# Altium PCB PCB1.PcbDoc (part 1 of 7)
Units mm, origin at the board's own origin, x right, y up, seen from the top; angles counter-clockwise.
Board outline 100 x 70 mm, 6 copper layers (Top Layer 1, GND_1, SIG, VCC, GND_2, Bottom Layer 1), stack 0.816 mm thick; 462 components, 328 nets, 2208 pads, 873 vias.
Unrouted connection lines stored in the file: 176.
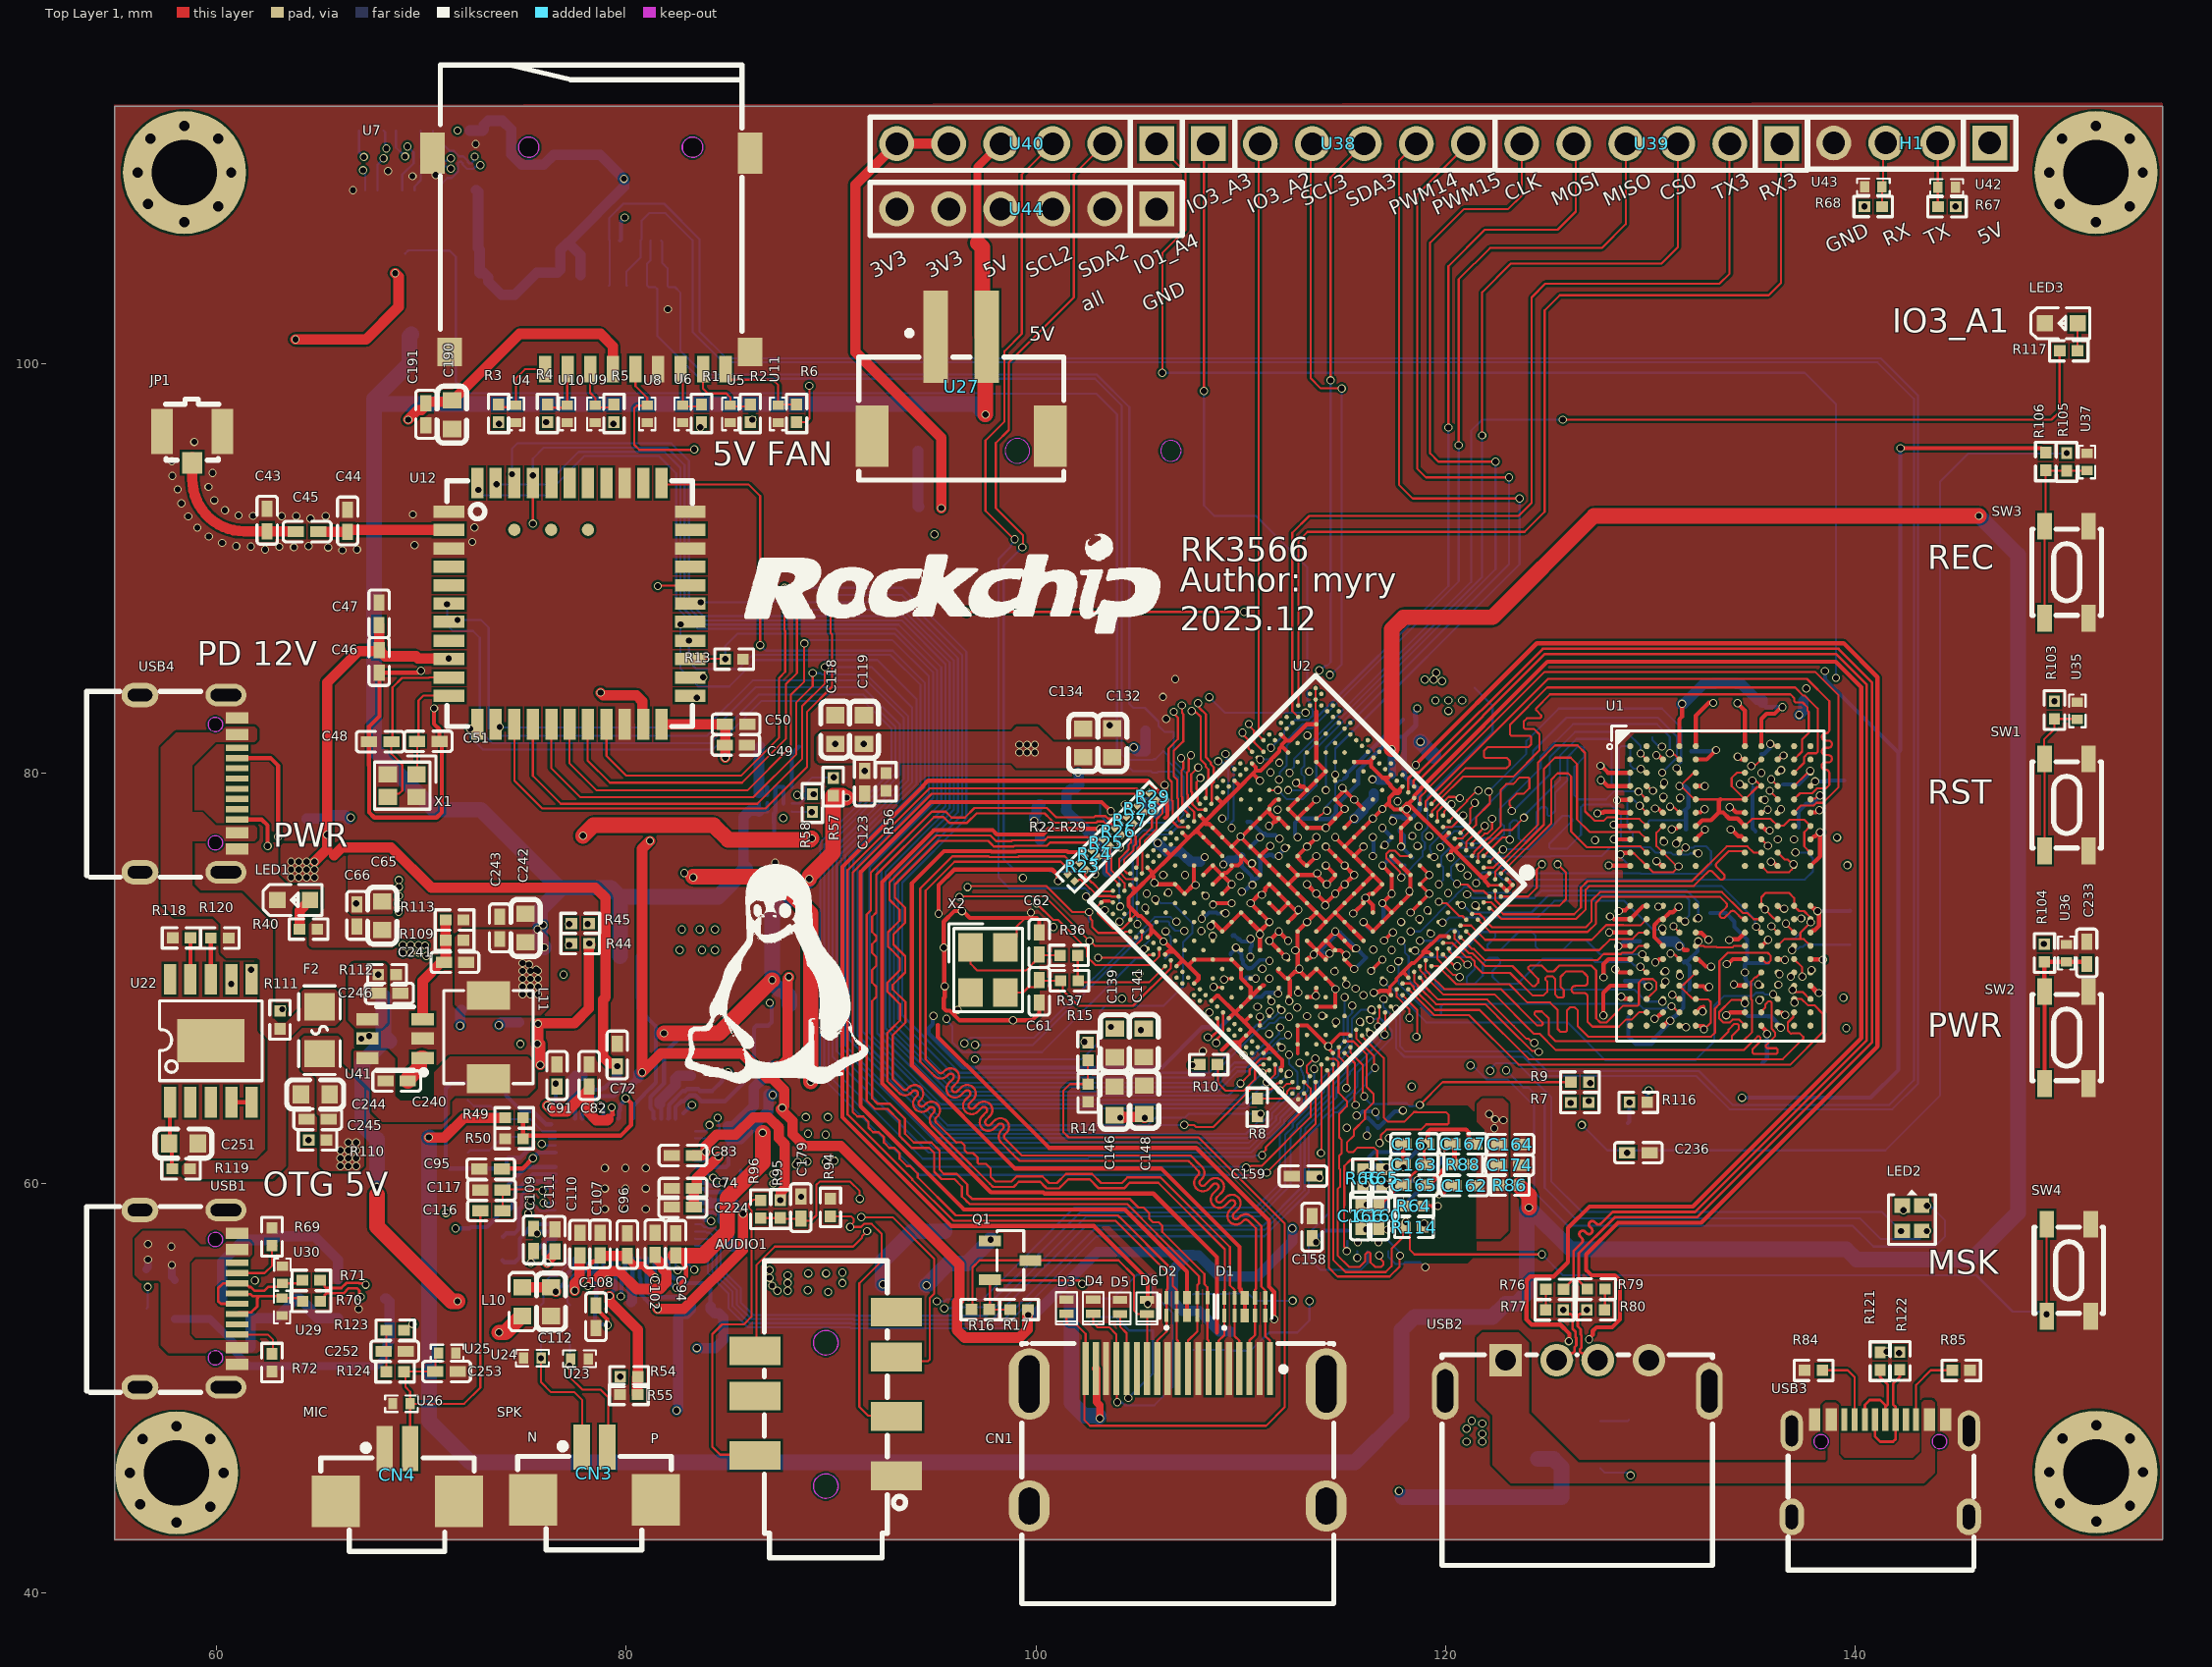
[diagram p0: Top Layer 1 view]
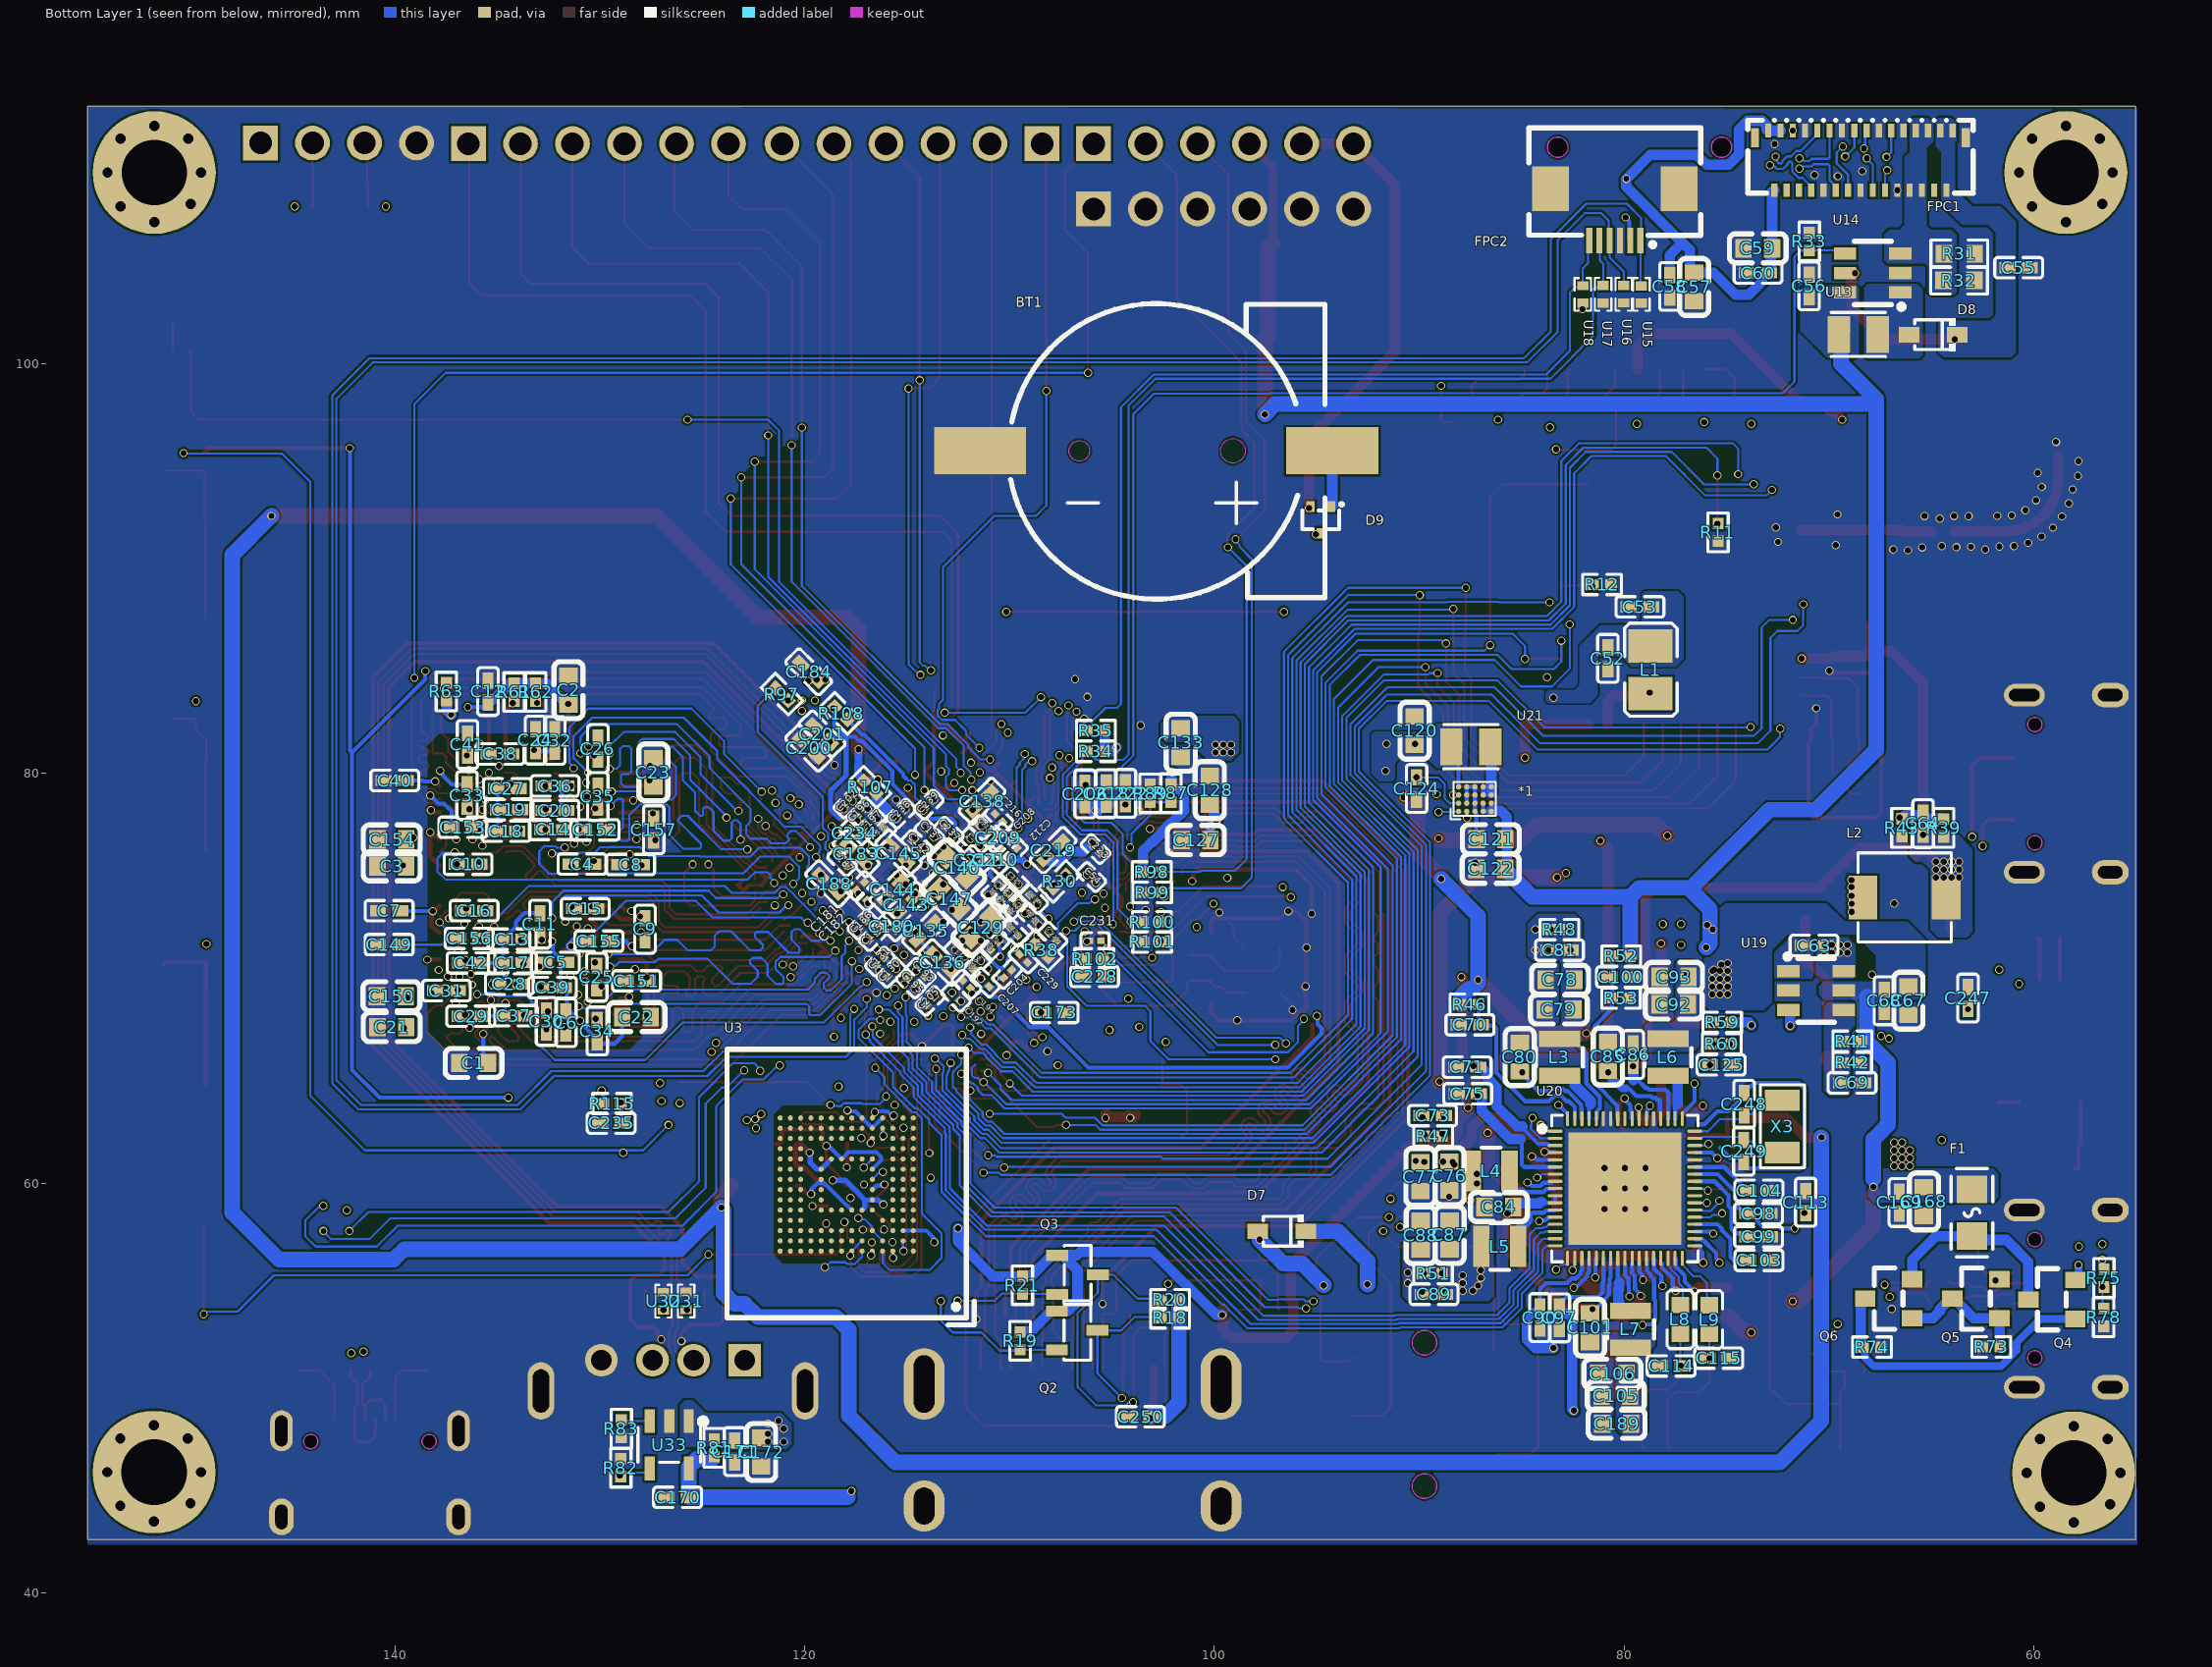
[diagram p1: Bottom Layer 1 view, seen from below]
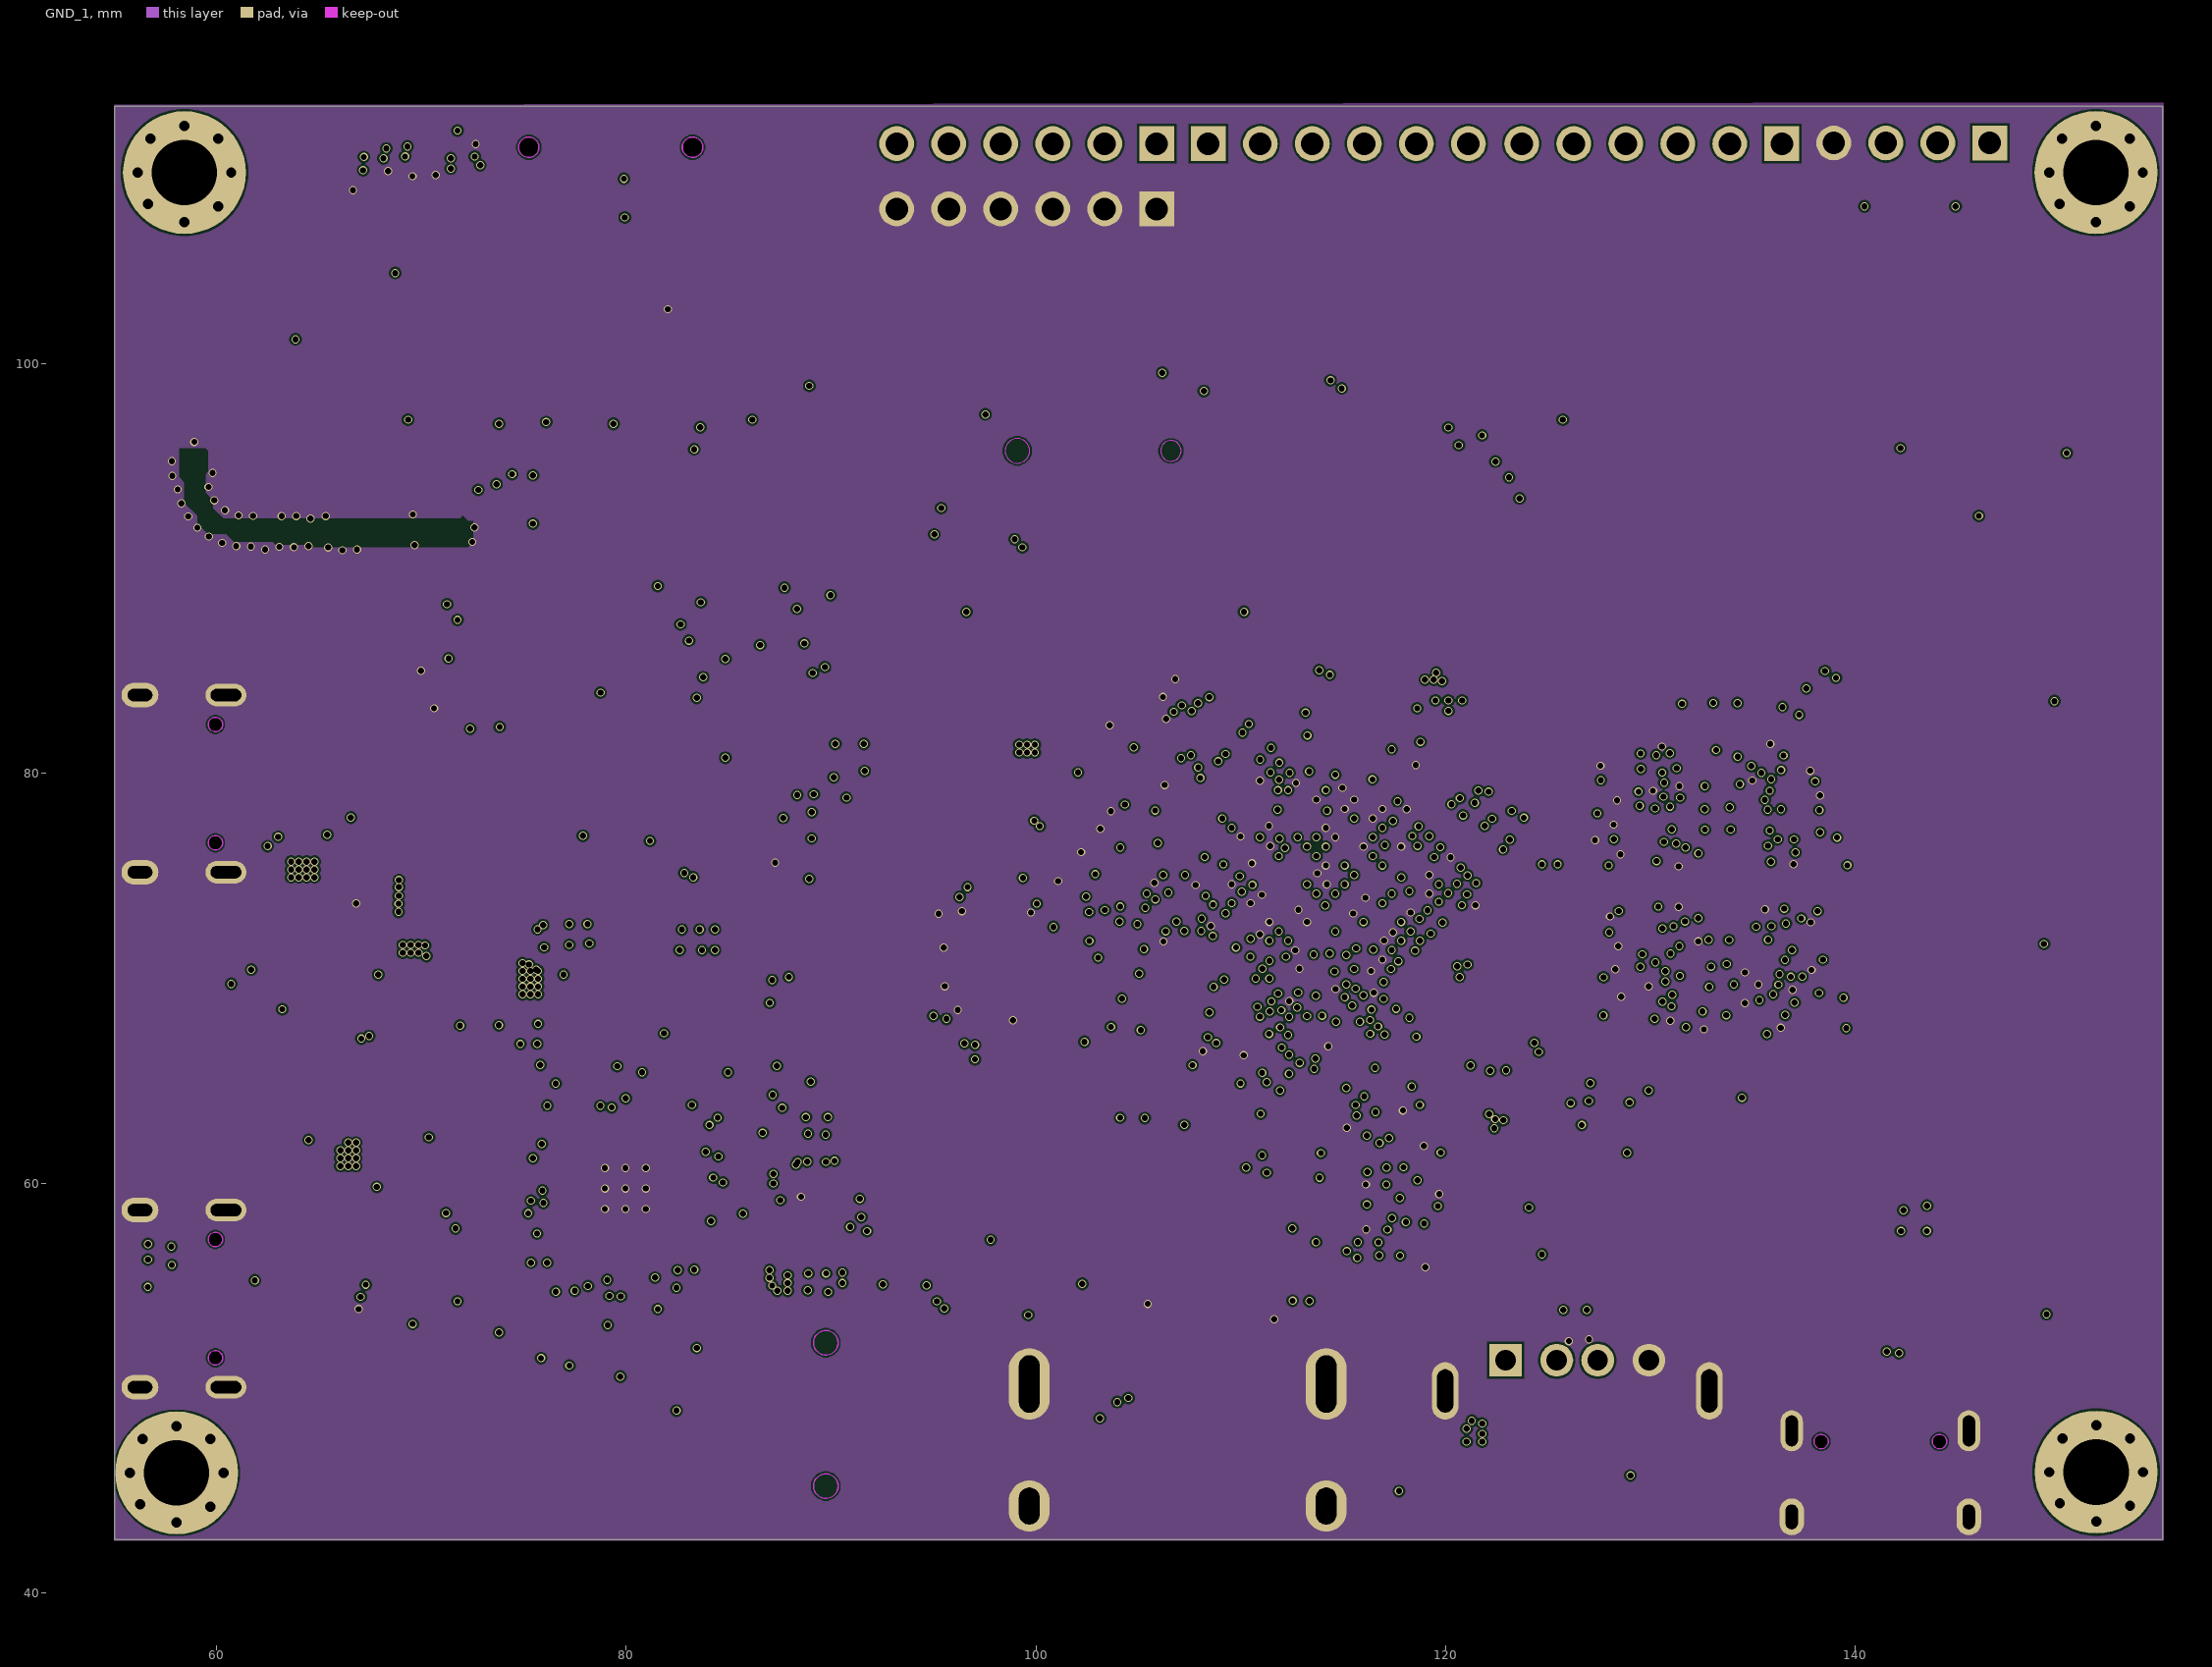
[diagram p2: GND_1]
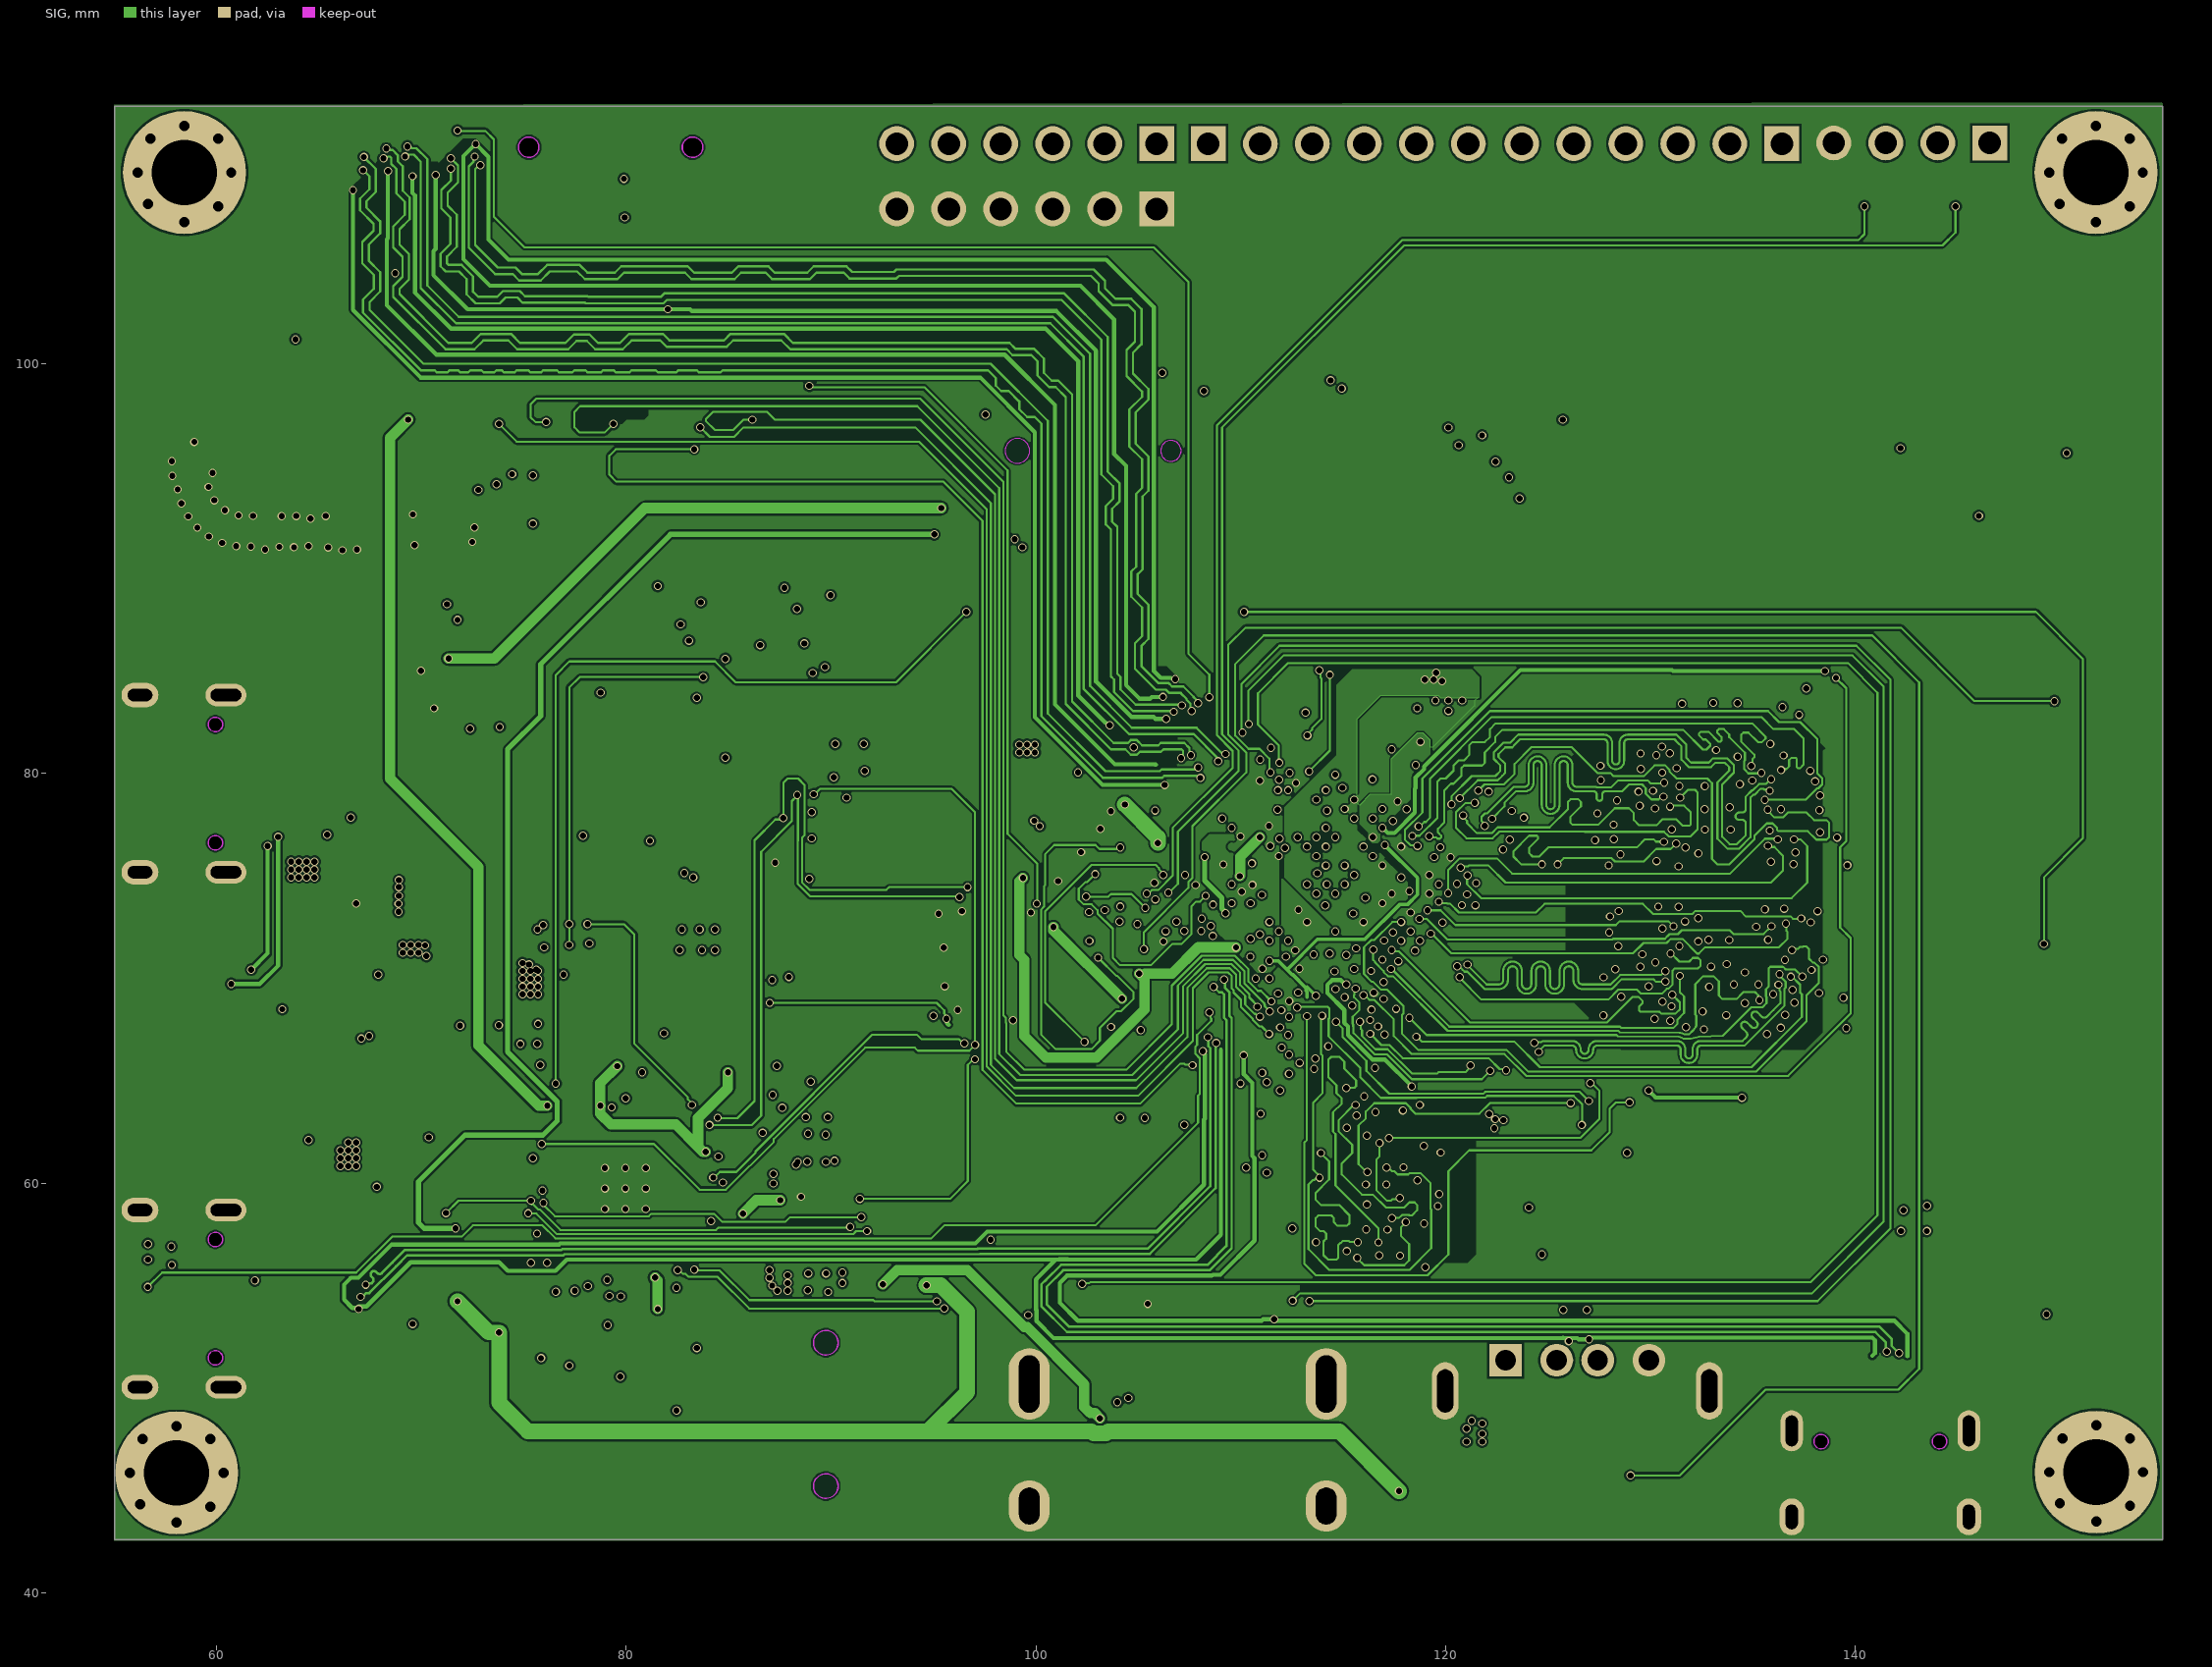
[diagram p3: SIG]
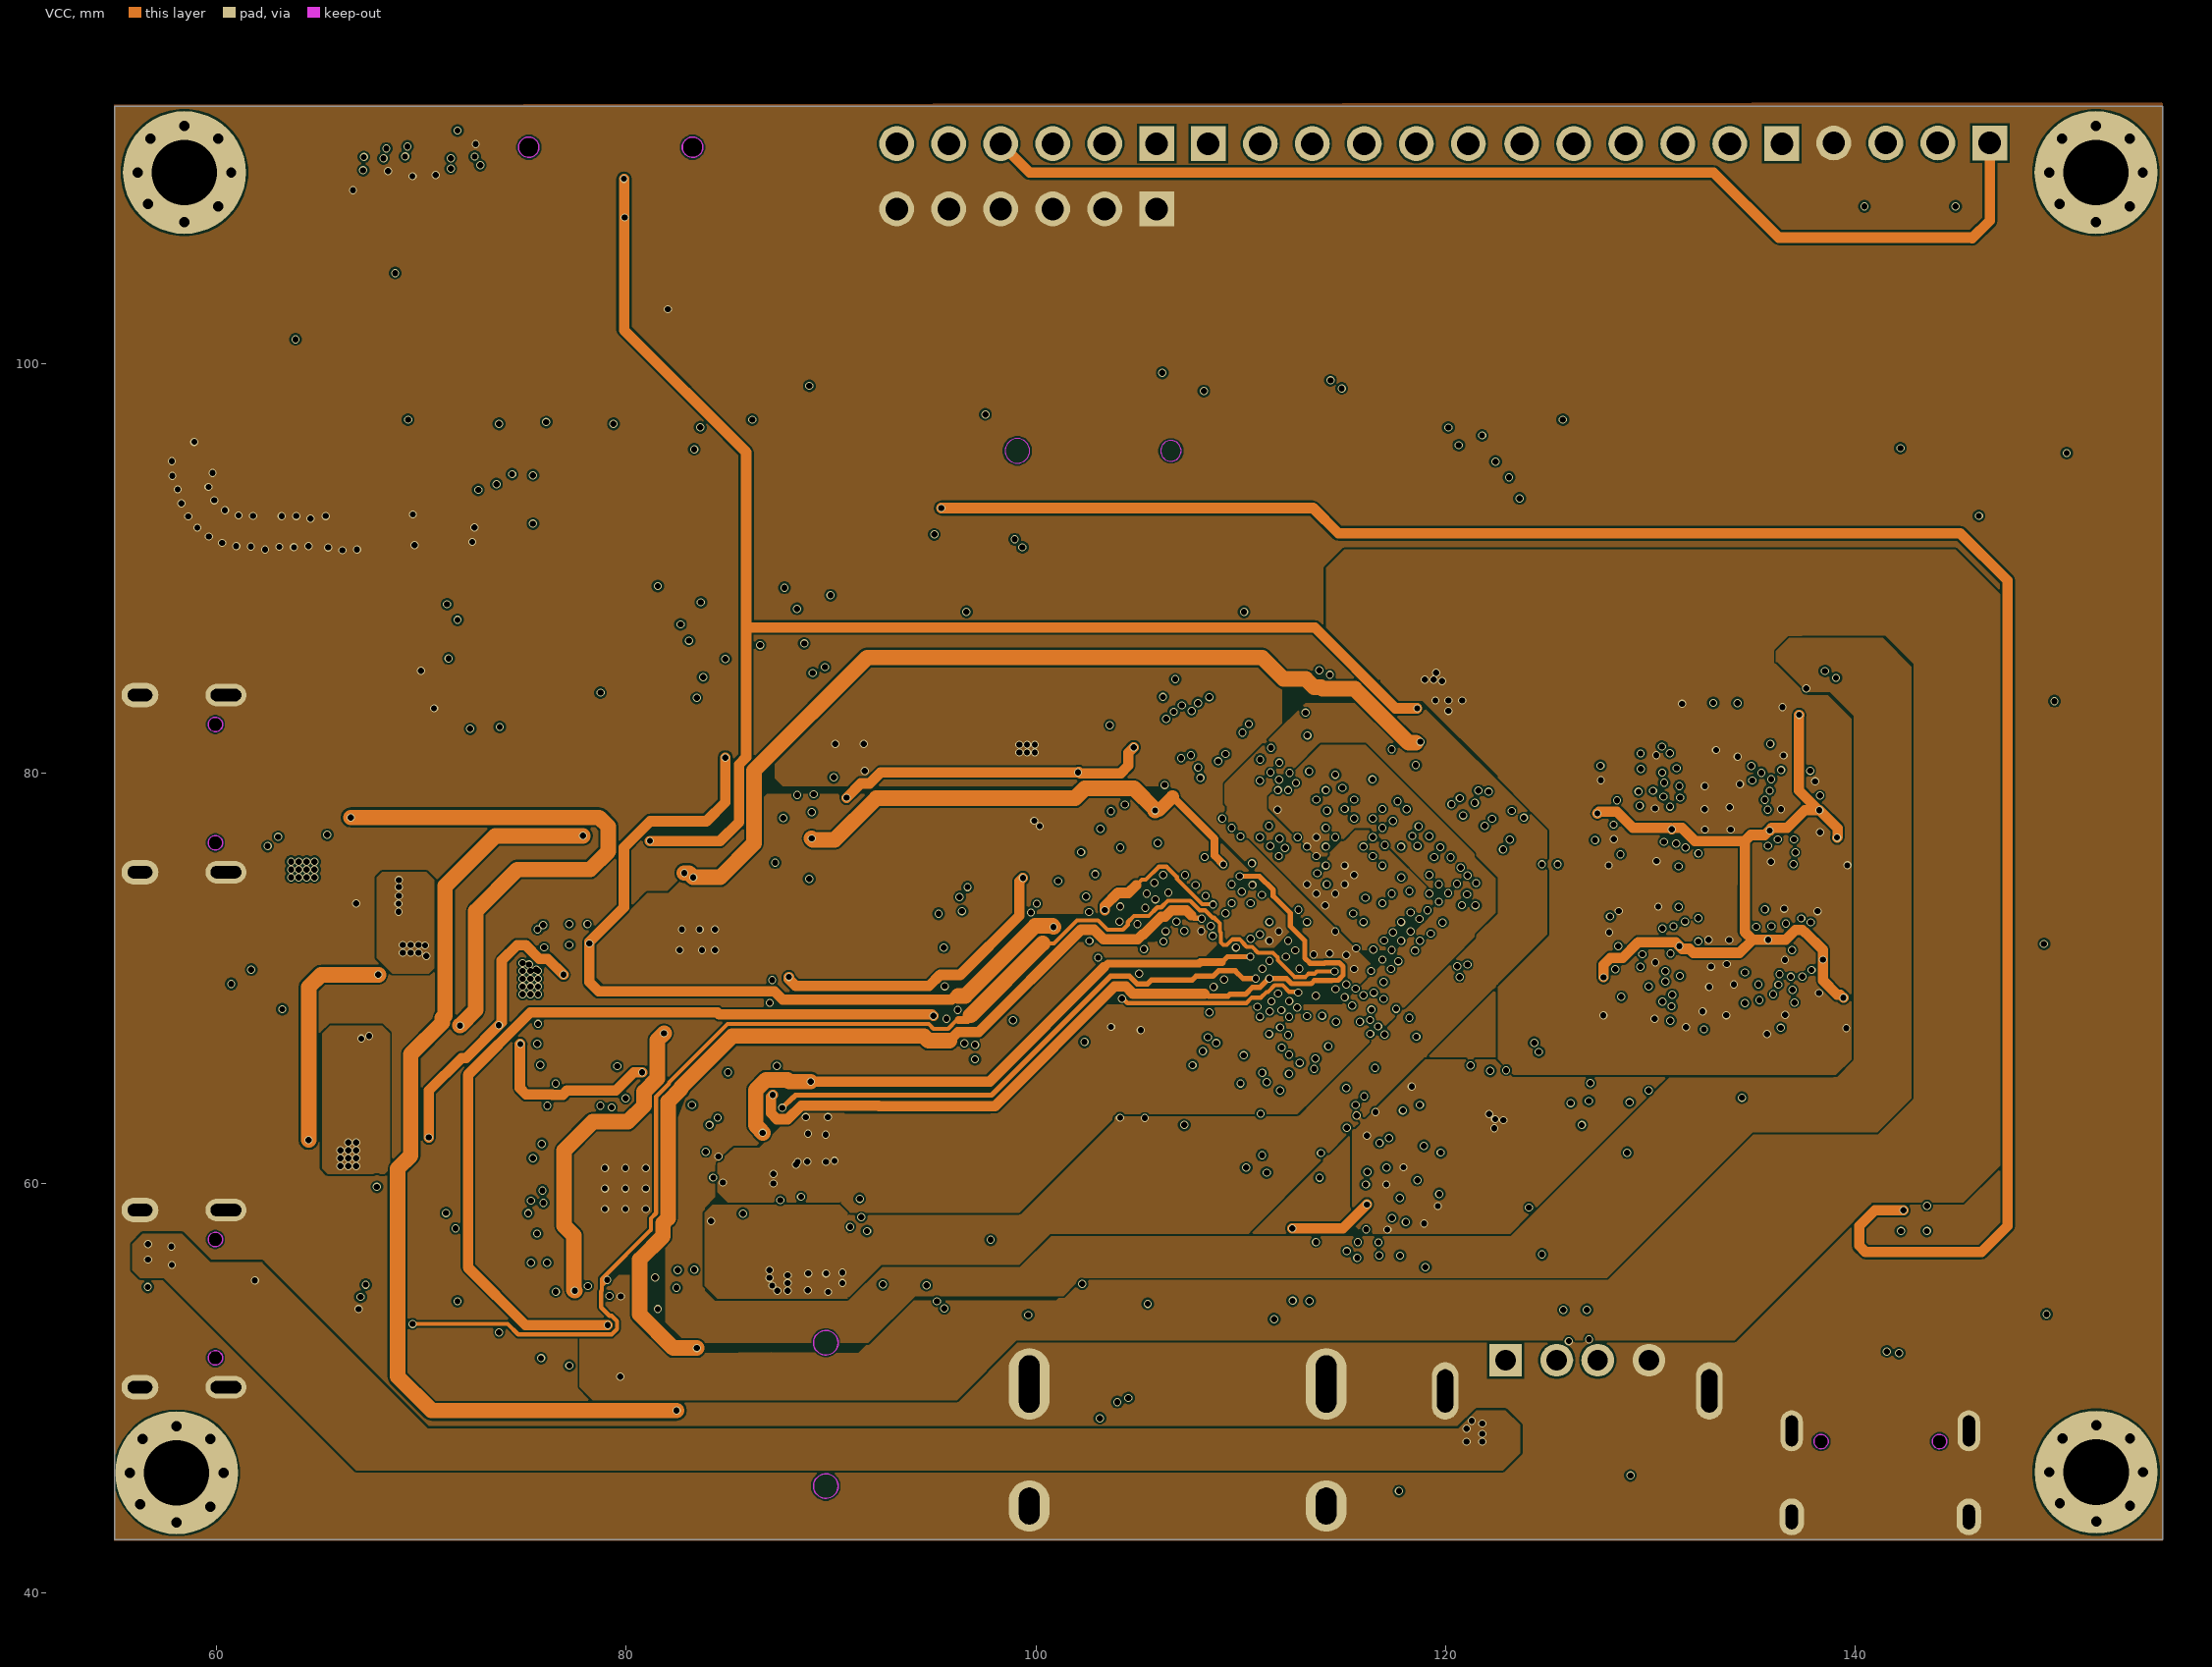
[diagram p4: VCC]
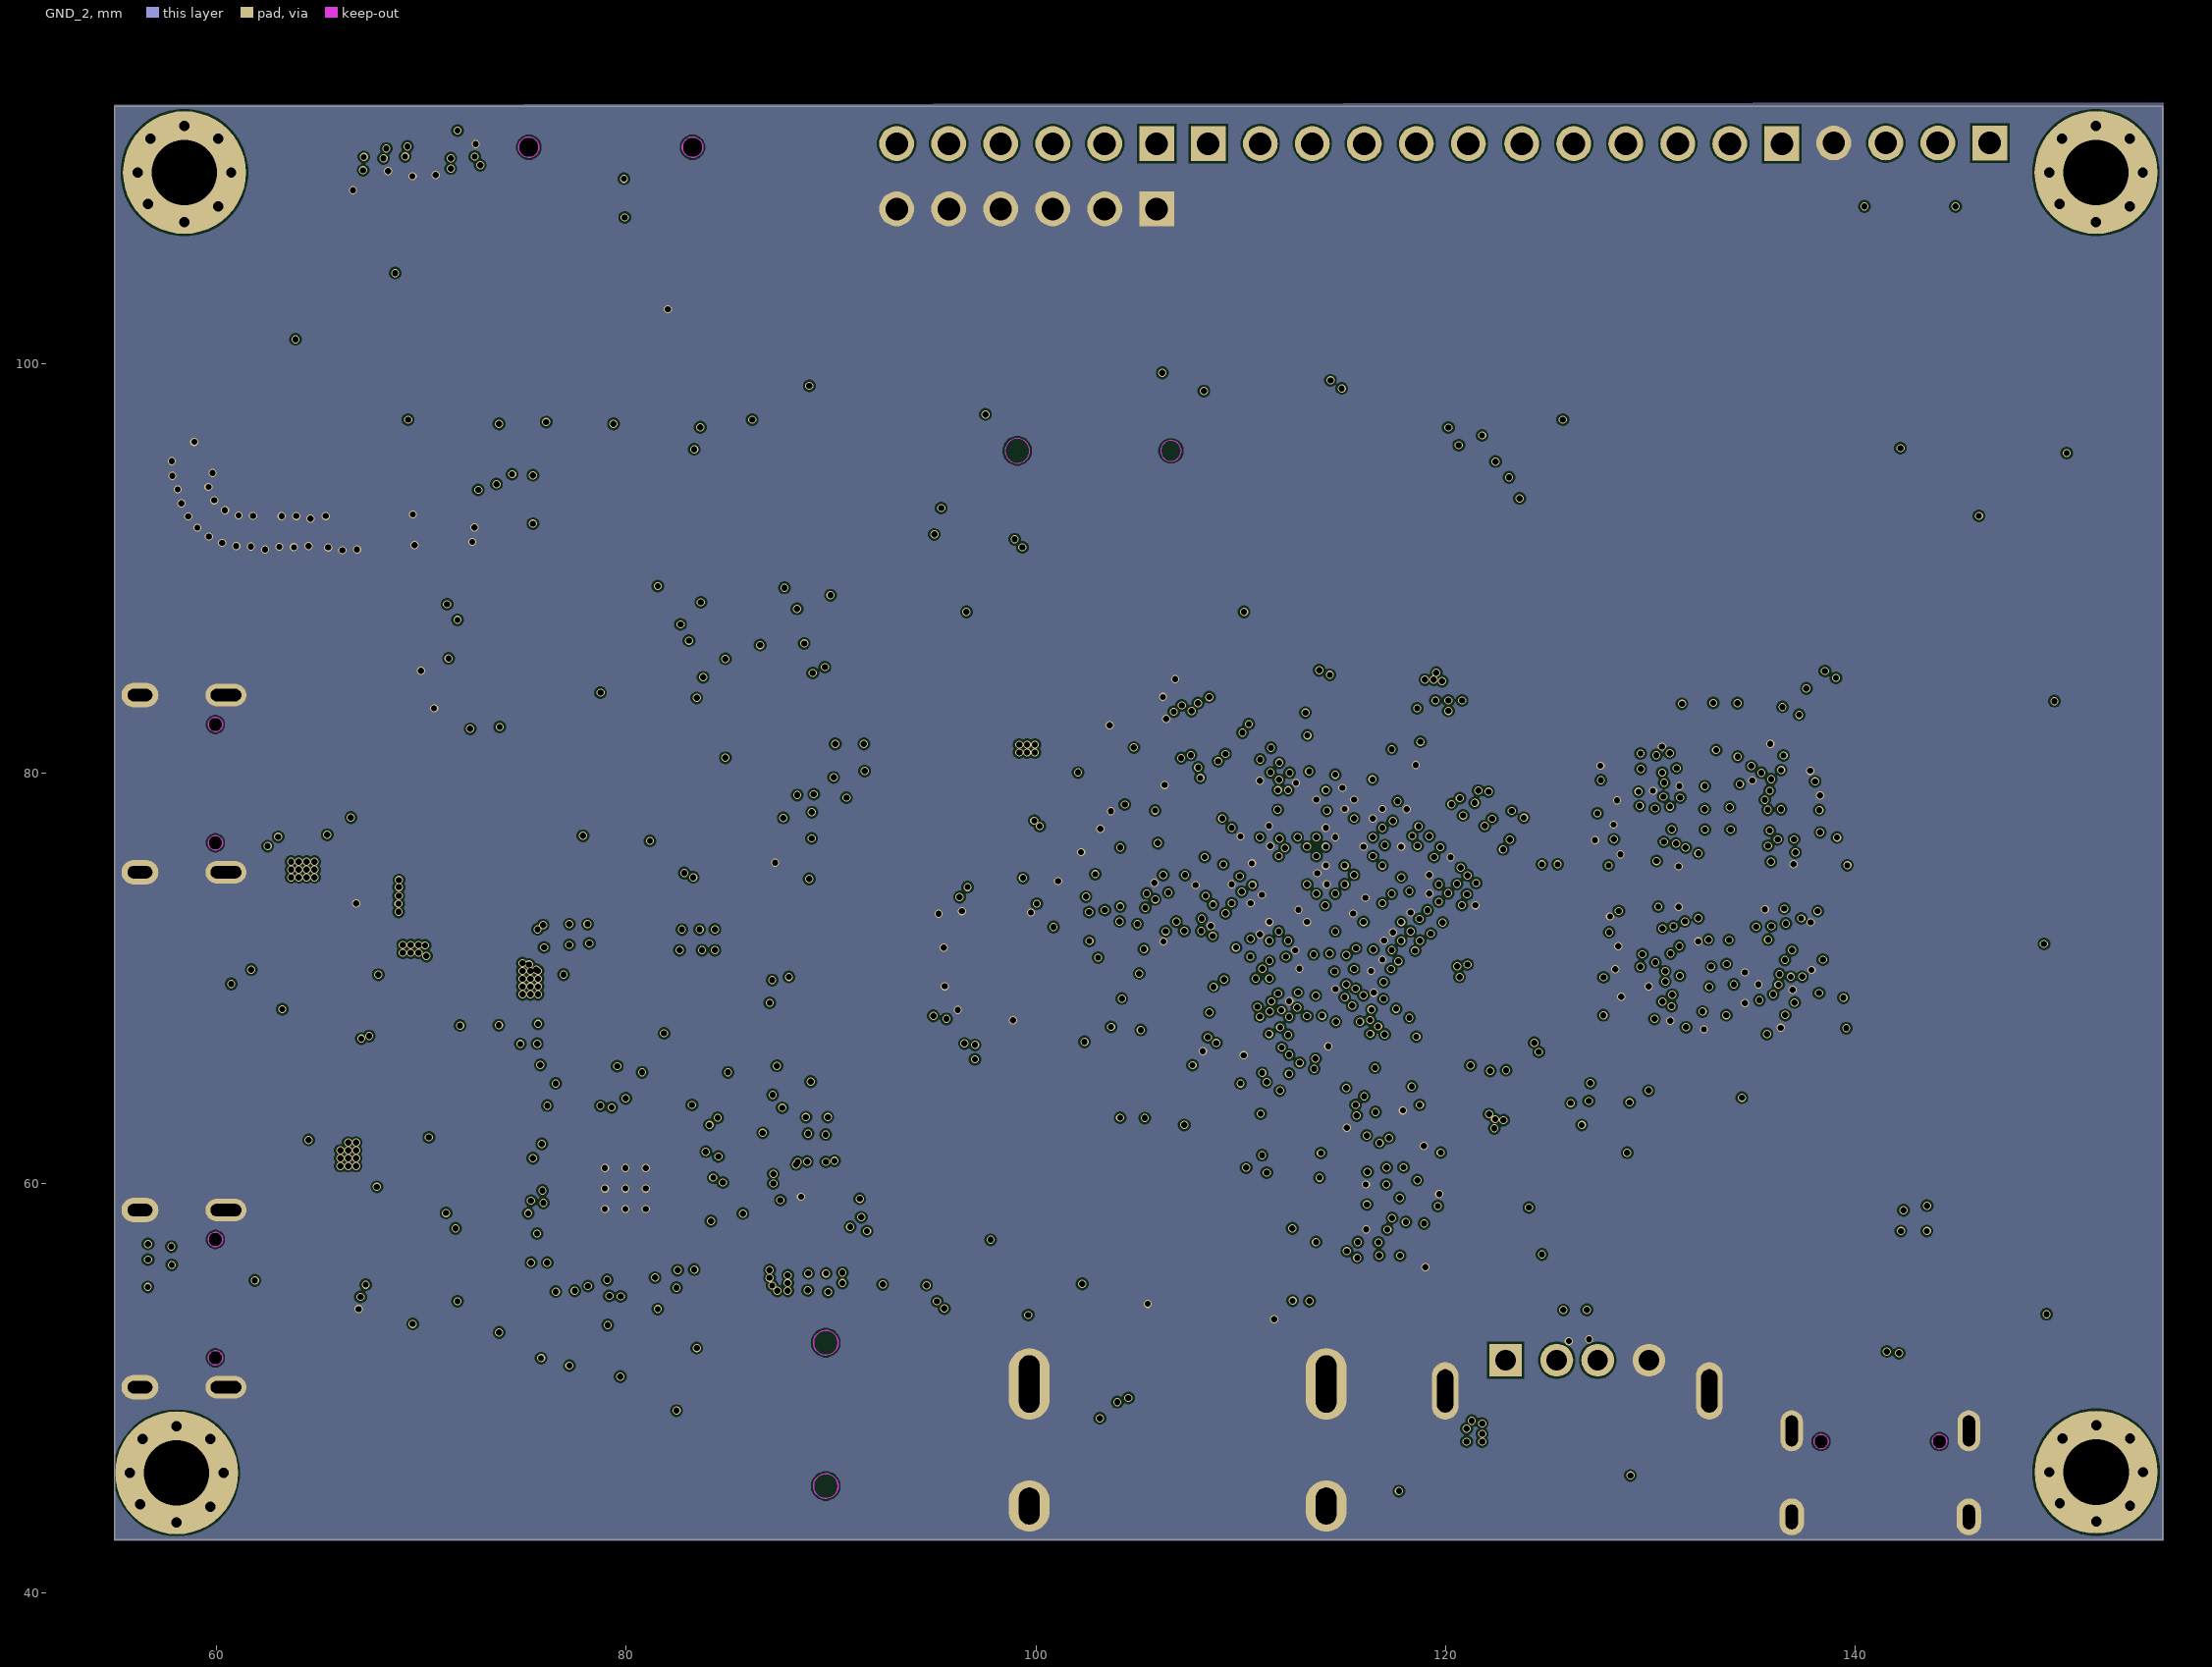
[diagram p5: GND_2]

## Layer stack, top to bottom
Top Solder: solder mask 0.0102, Solder Resist, Dk 3.5
Top Layer 1: signal copper 0.035
Dielectric 2: prepreg 0.0711, PP-006, Dk 4.1
GND_1: signal copper 0.035
Dielectric 4: prepreg 0.0711, PP-006, Dk 4.1
SIG: signal copper 0.0356
Dielectric 1: dielectric 0.32, FR-4, Dk 4.8
VCC: signal copper 0.0356
Dielectric 5: prepreg 0.0711, PP-006, Dk 4.1
GND_2: signal copper 0.035
Dielectric 3: prepreg 0.0711, PP-006, Dk 4.1
Bottom Layer 1: signal copper 0.035
Bottom Solder: solder mask 0.0102, Solder Resist, Dk 3.5

## Board outline
55.012,42.586 55.012,112.586 155.012,112.586 155.012,42.586

## Design rules (kind name [scope] priority, off if disabled: settings)
Clearance [All] p1: gap=0.102 ignorepadtopadclearanceinfootprint=FALSE
DiffPairsRouting 100ohm [InDifferentialPairClass('100ohm')] p1: maxlimit=0.254 minlimit=0.152 mostfreqgap=0.254 toplayer_maxgap=0.152 toplayer_prefgap=0.152 toplayer_minwidth=0.109 toplayer_maxwidth=0.109 toplayer_prefwidth=0.109 midlayer1_mingap=0.254 midlayer1_minwidth=0.381 midlayer1_maxwidth=0.381 midlayer1_prefwidth=0.381 midlayer2_mingap=0.203 midlayer2_maxgap=0.203 midlayer2_prefgap=0.203 midlayer2_minwidth=0.112 midlayer2_maxwidth=0.112 midlayer2_prefwidth=0.112 midlayer3_mingap=0.254 midlayer3_minwidth=0.381 midlayer3_maxwidth=0.381 midlayer3_prefwidth=0.381 midlayer4_mingap=0.254 midlayer4_minwidth=0.381 midlayer4_maxwidth=0.381 midlayer4_prefwidth=0.381 bottomlayer_maxgap=0.152 bottomlayer_prefgap=0.152 bottomlayer_minwidth=0.109 bottomlayer_maxwidth=0.109 bottomlayer_prefwidth=0.109 maxuncoupledlength=12.7
DiffPairsRouting 90ohm [InDifferentialPairClass('90ohm')] p2: maxlimit=0.254 minlimit=0.127 mostfreqgap=0.14 toplayer_maxgap=0.127 toplayer_prefgap=0.127 toplayer_minwidth=0.13 toplayer_maxwidth=0.13 toplayer_prefwidth=0.13 midlayer1_prefgap=0.127 midlayer1_minwidth=0.102 midlayer1_maxwidth=0.102 midlayer1_prefwidth=0.102 midlayer2_mingap=0.14 midlayer2_maxgap=0.14 midlayer2_minwidth=0.119 midlayer2_maxwidth=0.119 midlayer2_prefwidth=0.119 midlayer3_prefgap=0.127 midlayer3_minwidth=0.102 midlayer3_maxwidth=0.102 midlayer3_prefwidth=0.102 midlayer4_prefgap=0.127 midlayer4_minwidth=0.102 midlayer4_maxwidth=0.102 midlayer4_prefwidth=0.102 bottomlayer_prefgap=0.127 bottomlayer_minwidth=0.102 bottomlayer_maxwidth=0.102 bottomlayer_prefwidth=0.102 maxuncoupledlength=12.7
PolygonConnect [All] p1: connectstyle=Direct reliefconductorwidth=0.254 reliefentries=4 polygonreliefangle="90 Angle" airgapwidth=0.254
RoutingVias [All] p1: holewidth=0.152 width=0.254 viastyle="Through Hole" minholewidth=0.152 minwidth=0.254 maxholewidth=0.711 maxwidth=1.27
SolderMaskExpansion [All] p1: expansion=0.102 istentingtop=FALSE
SupplyNets "Schematic Supply Nets_30" [InNet('+12')] p1: voltage=0.000
SupplyNets "Schematic Supply Nets_32" [InNet('VCC12V_DCIN')] p2: voltage=0.000
SupplyNets "Schematic Supply Nets_31" [InNet('VCCIO6')] p3: voltage=0.000
SupplyNets "Schematic Supply Nets_29" [InNet('VCCIO_ACODEC')] p4: voltage=0.000
SupplyNets "Schematic Supply Nets_28" [InNet('VCCIO_SD')] p5: voltage=0.000
SupplyNets "Schematic Supply Nets_27" [InNet('VCCA1V8_IMAGE')] p6: voltage=0.000
SupplyNets "Schematic Supply Nets_26" [InNet('VDDA0V9_PMU')] p7: voltage=0.000
SupplyNets "Schematic Supply Nets_25" [InNet('VCCA_1V8')] p8: voltage=0.000
SupplyNets "Schematic Supply Nets_24" [InNet('VDD_NPU')] p9: voltage=0.000
SupplyNets "Schematic Supply Nets_23" [InNet('GND')] p10: voltage=0.000
SupplyNets "Schematic Supply Nets_22" [InNet('VCC5V0_USB_OTG')] p11: voltage=0.000
SupplyNets "Schematic Supply Nets_21" [InNet('VCC5V_HDMI_TX')] p12: voltage=0.000
SupplyNets "Schematic Supply Nets_20" [InNet('VCC5V0_USB_HOST')] p13: voltage=0.000
SupplyNets "Schematic Supply Nets_19" [InNet('VCCIO_FLASH')] p14: voltage=0.000
SupplyNets "Schematic Supply Nets_18" [InNet('VCCA1V8_PMU')] p15: voltage=0.000
SupplyNets "Schematic Supply Nets_9" [InNet('VCC1V8_DDR')] p16: voltage=0.000
SupplyNets "Schematic Supply Nets_17" [InNet('VCC3V3_SD')] p17: voltage=0.000
SupplyNets "Schematic Supply Nets_16" [InNet('VDDA_0V9')] p18: voltage=0.000
SupplyNets "Schematic Supply Nets_15" [InNet('VCCIO_WL')] p19: voltage=0.000
SupplyNets "Schematic Supply Nets_14" [InNet('VCC_DDR')] p20: voltage=0.000
SupplyNets "Schematic Supply Nets_13" [InNet('VDD_LOGIC')] p21: voltage=0.000
SupplyNets "Schematic Supply Nets_12" [InNet('VDD_CPU')] p22: voltage=0.000
SupplyNets "Schematic Supply Nets_10" [InNet('VDD_GPU')] p23: voltage=0.000
SupplyNets "Schematic Supply Nets_8" [InNet('VCC_1V8')] p24: voltage=0.000
SupplyNets "Schematic Supply Nets_7" [InNet('VDDA0V9_IMAGE')] p25: voltage=0.000
SupplyNets "Schematic Supply Nets_6" [InNet('VCC3V3_SYS')] p26: voltage=0.000
SupplyNets "Schematic Supply Nets_5" [InNet('VCC3V3_PMU')] p27: voltage=0.000
SupplyNets "Schematic Supply Nets_4" [InNet('MIPI_DSI_VCC_LED+')] p28: voltage=0.000
SupplyNets "Schematic Supply Nets_3" [InNet('MIPI_DSI_VCC_LED-')] p29: voltage=0.000
SupplyNets "Schematic Supply Nets_2" [InNet('VCC5V0_SYS')] p30: voltage=0.000
SupplyNets "Schematic Supply Nets_1" [InNet('VCC_3V3')] p31: voltage=0.000
Width LPDDR4A0-5A [InNetClass('LPDDR4_A0-5A')] p1: maxlimit=0.102 minlimit=0.102 preferedwidth=0.102
Width DDR [InNetClass('LPDDR4_1A')] p2: maxlimit=0.102 minlimit=0.102 preferedwidth=0.102
Width [All] p3: maxlimit=1.016 minlimit=0.076 preferedwidth=0.102
29 further rules are at their usual default settings.

## Classes and differential pairs
differential pair class 100ohm: HDMI_TX0 HDMI_TX1 HDMI_TX2 HDMI_TXC MIPI_DSI_0 MIPI_DSI_1 MIPI_DSI_2 MIPI_DSI_3 MIPI_DSI_CLK
differential pair class 90ohm: USB_H1 USB_H2 USB_HOST1 USB_HOST2 USB_OTG0 USB_OTG_D
net class VCCA: VCCA1V8_IMAGE VCCA1V8_PMU VCCA_1V8
net class VDDA: VDDA0V9_IMAGE VDDA0V9_PMU VDDA_0V9
net class VCC: VCC3V3_PMU VCC3V3_SD VCC_1V8 VCC_3V3
net class VCCIO: VCCIO6 VCCIO_ACODEC VCCIO_FLASH VCCIO_SD VCCIO_WL
net class PWR_DDR: VCC1V8_DDR VCC_DDR
net class PWR_SoC: VCC_DDR VDD_CPU VDD_GPU VDD_LOGIC VDD_NPU
net class PWR: +12 VCC3V3_SYS VCC5V0_SYS VCC12V_DCIN
net class PMIC: PMIC_INT_L PMIC_SLEEP_H
net class I2C0: I2C0_SCL_PMIC I2C0_SDA_PMIC
net class I2S1_PMIC: I2S1_LRCK_TX_M0_PMIC I2S1_MCLK_M0_PMIC I2S1_SCLK_TX_M0_PMIC I2S1_SDI0_M0/PDM I2S1_SDO0_MO_PMIC PDM_CLK0_M0_PMIC
net class MIPI_Touch: I2C1_SCL_TP I2C1_SDA_TP MIPI_DSI_0_N MIPI_DSI_0_P MIPI_DSI_1_N MIPI_DSI_1_P MIPI_DSI_2_N MIPI_DSI_2_P MIPI_DSI_3_N MIPI_DSI_3_P MIPI_DSI_CLK_N MIPI_DSI_CLK_P MIPI_DSI_RESET MIPI_DSI_VCC_LED+ MIPI_DSI_VCC_LED- TP_INT_A TP_RST
net class Audio_MIC: MIC1P SPK_OUTN SPK_OUTP
net class HPJ: HP_PLUG_IN_DET HP_SNS HPL_OUT HPR_OUT
net class SD_CARD: SDMMC0_CLK SDMMC0_CMD SDMMC0_D0 SDMMC0_D1 SDMMC0_D2 SDMMC0_D3 SDMMC0_DET_L
net class WIFI: BT_REG_ON_H BT_WAKE_HOST_H HOST_WAKE_BT_H I2S2_LRCK_TX_M0 I2S2_SCLK_TX_M0 I2S2_SDI_M0 I2S2_SDO_M0 PMIC_32KOUT_WIFI SDMMC1_CLK SDMMC1_CMD SDMMC1_D0 SDMMC1_D1 SDMMC1_D2 SDMMC1_D3 UART1_CTSN_M0 UART1_RTSN_M0 UART1_RX_M0 UART1_TX_M0 WIFI_REG_ON_H WIFI_WAKE_HOST_H WIFI_XTAL_IN WIFI_XTAL_OUT
net class USB: USB_HOST1_N USB_HOST1_P USB_HOST2_N USB_HOST2_P USB_HOST_PWREN_H USB_OTG0_N USB_OTG0_P USB_OTG0_VBUSDET USB_OTG_D_N USB_OTG_D_P
net class HDMI: HDMI_TX0_N HDMI_TX0_P HDMI_TX1_N HDMI_TX1_P HDMI_TX2_N HDMI_TX2_P HDMI_TX_CEC_PORT HDMI_TX_HPD_PORT HDMI_TX_HPDIN HDMI_TXC_N HDMI_TXC_P HDMI_TXDDC_SCL_PORT HDMI_TXDDC_SDA_PORT HDMITX_CEC_M0 HDMITX_SCL HDMITX_SDA
net class EMMC: EMMC_CMD EMMC_D0/FLASH_D0 EMMC_D1/FLASH_D1 EMMC_D2/FLASH_D2 EMMC_D3/FLASH_D3 EMMC_D4/FLASH_D4 EMMC_D5/FLASH_D5 EMMC_D6/FLASH_D6 EMMC_D7/FLASH_D7
net class LPDDR4_A0-5B: LPDDR4_A0_B LPDDR4_A1_B LPDDR4_A2_B LPDDR4_A3_B LPDDR4_A4_B LPDDR4_A5_B LPDDR4_CKE0_B LPDDR4_CKE1_B LPDDR4_CLK_B_N LPDDR4_CLK_B_P LPDDR4_CS0n_B LPDDR4_CS1n_B LPDDR4_ODT0_CA_B
net class LPDDR4_A0-5A: LPDDR4_A0_A LPDDR4_A1_A LPDDR4_A2_A LPDDR4_A3_A LPDDR4_A4_A LPDDR4_A5_A LPDDR4_CKE0_A LPDDR4_CKE1_A LPDDR4_CLK_A_N LPDDR4_CLK_A_P LPDDR4_CS0n_A LPDDR4_CS1n_A LPDDR4_ODT0_CA_A
net class LPDDR4_2B: LPDDR4_DM1_B LPDDR4_DQ8_B LPDDR4_DQ9_B LPDDR4_DQ10_B LPDDR4_DQ11_B LPDDR4_DQ12_B LPDDR4_DQ13_B LPDDR4_DQ14_B LPDDR4_DQ15_B LPDDR4_DQS1_B_N LPDDR4_DQS1_B_P
net class LPDDR4_1B: LPDDR4_DM0_B LPDDR4_DQ0_B LPDDR4_DQ1_B LPDDR4_DQ2_B LPDDR4_DQ3_B LPDDR4_DQ4_B LPDDR4_DQ5_B LPDDR4_DQ6_B LPDDR4_DQ7_B LPDDR4_DQS0_B_N LPDDR4_DQS0_B_P
net class LPDDR4_2A: LPDDR4_DM1_A LPDDR4_DQ8_A LPDDR4_DQ9_A LPDDR4_DQ10_A LPDDR4_DQ11_A LPDDR4_DQ12_A LPDDR4_DQ13_A LPDDR4_DQ14_A LPDDR4_DQ15_A LPDDR4_DQS1_A_N LPDDR4_DQS1_A_P
net class LPDDR4_1A: LPDDR4_DM0_A LPDDR4_DQ0_A LPDDR4_DQ1_A LPDDR4_DQ2_A LPDDR4_DQ3_A LPDDR4_DQ4_A LPDDR4_DQ5_A LPDDR4_DQ6_A LPDDR4_DQ7_A LPDDR4_DQS0_A_N LPDDR4_DQS0_A_P
component class RK_USB_GPIO: C173 C196 C197 C198 C199 C200 C201 C202 C203 C204 C205 C206 C207 C208 C234 C235 C236 C237 C238 C239 LED3 R107 R108 R115 R116 R117
component class RK_DDR: C180 C181 C182 C183 C184 C185 C186 C187 C188 C189 R97
component class POWER_FLASH_POWER_MANAGE: C174 R86 R87 R88 R89
component class USB_OTG_AND_HOST: C168 C169 C170 C171 C172 F1 Q4 Q5 Q6 R69 R70 R71 R72 R73 R74 R75 R76 R77 R78 R79 R80 R81 R82 R83 R84 R85 R121 R122 U29 U31 U32 U33 USB1 USB2 USB3
component class DEBUG_AND_GPIO: C233 H1 LED2 R67 R68 R103 R104 R105 R106 SW1 SW2 SW3 U27 U35 U36 U37 U38 U39 U40 U42 U43 U44
component class RK_POWER: C126 C127 C128 C129 C130 C131 C132 C133 C134 C135 C136 C137 C138 C139 C140 C141 C142 C143 C144 C145 C146 C147 C148 U2
component class Audio_AND_HPJ: AUDIO1 C179 C252 C253 CN3 CN4 R94 R95 R96 R123 R124 U23 U24 U25 U26
component class POWER_PMIC: BT1 C70 C71 C72 C73 C74 C75 C76 C77 C78 C79 C80 C81 C82 C83 C84 C85 C86 C87 C88 C89 C90 C91 C92 C93 C94 C95 C96 C97 C98 C99 C100 C101 C102 C103 C104 C105 C106 C107 C108 C109 C110 C111 C112 C113 C114 C115 C116 C117 C248 C249 D9 L3 L4 L5 L6 L8 L9 L10 R44 R45 R46 R47 R48 R49 R50 R51 R52 R53 R54 R55 U20 X3
component class POWER_EXTENSION: *1 C118 C119 C120 C121 C122 C123 C124 C125 R56 R57 R58 R59 R60 U21
component class PWOER: C63 C64 C65 C66 C67 C68 C69 C240 C241 C242 C243 C244 C245 C246 C247 C251 F2 L2 L11 P R39 R40 R41 R42 R43 R109 R110 R111 R112 R113 R118 R119 R120 U19 U22 U41 USB4
component class RK_OSC_PLL_PMUO1_2: C61 C62 C219 C220 C221 C222 C223 C224 C225 C226 C227 C228 C229 C230 C231 R34 R35 R36 R37 R38 R98 R99 R100 R101 R102 X2
component class MIPI_DSI_TP: C55 C56 C57 C58 C59 C60 D8 FPC1 FPC2 R31 R32 R33 U13 U14 U15 U16 U17 U18
component class RK_MIPI_HDMI: C54 C209 C210 C211 C212 C213 C214 C215 C216 C217 C218 R22-R29 R23 R24 R25 R26 R27 R28 R29 R30
component class HDMI: C250 CN1 D1 D2 D3 D4 D5 D6 D7 Q1 Q2 Q3 R14 R15 R16 R17 R18 R19 R20 R21
component class Wi-Fi_BT: C43 C44 C45 C46 C47 C48 C49 C50 C51 C52 C53 JP1 L1 R11 R12 R13 U12 X1
component class DDR: C1 C2 C3 C4 C5 C6 C7 C8 C9 C10 C11 C12 C13 C14 C15 C16 C17 C18 C19 C20 C21 C22 C23 C24 C25 C26 C27 C28 C29 C30 C31 C32 C33 C34 C35 C36 C37 C38 C39 C40 C41 C42 C149 C150 C151 C152 C153 C154 C155 C156 C157 R61 R62 R63 U1
component class RK_FLASH_SD_SARADC: C192 C193 C194 C195 R7 R8 R9 R10 SW4
component class FLASH_SD: C158 C159 C160 C161 C163 C164 C165 C166 C167 C190 C191 R1 R2 R3 R4 R5 R6 R64 R65 R66 R114 U3 U4 U5 U6 U7 U8 U9 U10 U11
differential pair USB_OTG_D: +USB_OTG_D_P -USB_OTG_D_N
differential pair USB_H1: +USB_H1_P -USB_H1_N
differential pair USB_H2: +USB_H2_P -USB_H2_N
differential pair LPDDR4_DQS1_B: +LPDDR4_DQS1_B_P -LPDDR4_DQS1_B_N
differential pair LPDDR4_DQS1_A: +LPDDR4_DQS1_A_P -LPDDR4_DQS1_A_N
differential pair LPDDR4_DQS0_B: +LPDDR4_DQS0_B_P -LPDDR4_DQS0_B_N
differential pair LPDDR4_DQS0_A: +LPDDR4_DQS0_A_P -LPDDR4_DQS0_A_N
differential pair LPDDR4_CLK_B: +LPDDR4_CLK_B_P -LPDDR4_CLK_B_N
differential pair LPDDR4_CLK_A: +LPDDR4_CLK_A_P -LPDDR4_CLK_A_N
differential pair HDMI_TXC: +HDMI_TXC_P -HDMI_TXC_N
differential pair HDMI_TX0: +HDMI_TX0_P -HDMI_TX0_N
differential pair HC: +HC_P -HC_N
differential pair H2: +H2_P -H2_N
differential pair H1: +H1_P -H1_N
differential pair H0: +H0_P -H0_N
differential pair MIPI_DSI_CLK: +MIPI_DSI_CLK_P -MIPI_DSI_CLK_N
differential pair MIPI_DSI_3: +MIPI_DSI_3_P -MIPI_DSI_3_N
differential pair MIPI_DSI_2: +MIPI_DSI_2_P -MIPI_DSI_2_N
differential pair MIPI_DSI_1: +MIPI_DSI_1_P -MIPI_DSI_1_N
differential pair HDMI_TX2: +HDMI_TX2_P -HDMI_TX2_N
differential pair HDMI_TX1: +HDMI_TX1_P -HDMI_TX1_N
differential pair MIPI_DSI_0: +MIPI_DSI_0_P -MIPI_DSI_0_N
differential pair USB_OTG0: +USB_OTG0_P -USB_OTG0_N
differential pair USB_HOST2: +USB_HOST2_P -USB_HOST2_N
differential pair USB_HOST1: +USB_HOST1_P -USB_HOST1_N

## Components (designator, comment, footprint, x,y, rotation, side; value= is the part's Value field where it differs from the comment)
*1 "TCS4525_WT_2" TCS4525 88.076,78.149 r90 bottom
AUDIO1 "PJ-393_C2837065" AUDIO-SMD_PJ-393 89.741,49.702 r0 top
BT1 "CR1220-2ZX" BAT-SMD_CR1220-2ZX 102.843,95.758 r0 bottom
C1 "22uF" C0603 136.174,65.865 r180 bottom
C2 "10uF" C0603 131.54,84.071 r270 bottom
C3 "10uF" C0603 140.171,75.465 r180 bottom
C4 "1uF" C0402 130.881,75.578 r180 bottom
C5 "100nF" C0402 132.183,70.773 r0 bottom
C6 "100nF" C0402 131.668,67.835 r270 bottom
C7 "100nF" C0402 140.298,73.301 r180 bottom
C8 "100nF" C0402 128.508,75.551 r180 bottom
C9 "100nF" C0402 127.803,72.397 r270 bottom
C10 "100nF" C0402 136.446,75.572 r180 bottom
C11 "100nF" C0402 132.935,72.642 r270 bottom
C12 "100nF" C0402 135.472,84.004 r270 bottom
C13 "100nF" C0402 134.292,71.912 r180 bottom
C14 "100nF" C0402 132.288,77.266 r0 bottom
C15 "100nF" C0402 130.722,73.399 r180 bottom
C16 "100nF" C0402 136.149,73.301 r0 bottom
C17 "100nF" C0402 134.28,70.765 r180 bottom
C18 "100nF" C0402 134.591,77.183 r180 bottom
C19 "100nF" C0402 134.448,78.23 r180 bottom
C20 "100nF" C0402 132.205,78.194 r0 bottom
C21 "22uF" C0603 140.171,67.614 r180 bottom
C22 "10uF" C0603 128.224,68.105 r180 bottom
C23 "10uF" C0603 127.398,80.055 r270 bottom
C24 "1uF" C0402 133.15,81.631 r270 bottom
C25 "100nF" C0402 130.163,70.055 r90 bottom
C26 "100nF" C0402 130.105,81.218 r270 bottom
C27 "100nF" C0402 134.526,79.259 r180 bottom
C28 "100nF" C0402 134.425,69.712 r180 bottom
C29 "100nF" C0402 136.313,68.144 r0 bottom
C30 "100nF" C0402 132.617,67.894 r90 bottom
C31 "100nF" C0402 137.501,69.397 r0 bottom
C32 "100nF" C0402 132.214,81.615 r270 bottom
C33 "100nF" C0402 136.495,78.926 r270 bottom
C34 "100nF" C0402 130.137,67.426 r90 bottom
C35 "100nF" C0402 130.109,78.872 r270 bottom
C36 "100nF" C0402 132.199,79.396 r0 bottom
C37 "100nF" C0402 134.226,68.17 r180 bottom
C38 "100nF" C0402 134.89,80.956 r180 bottom
C39 "100nF" C0402 132.323,69.545 r0 bottom
C40 "100nF" C0402 140.026,79.658 r180 bottom
C41 "100nF" C0402 136.473,81.416 r270 bottom
C42 "100nF" C0402 136.294,70.754 r0 bottom
C43 "NC" C0402 62.461,92.373 r90 top
C44 "NC" C0402 66.392,92.338 r90 top
C45 "10pF" C0402 64.414,91.813 r0 top
C46 "100nF" C0402 67.928,85.469 r90 top
C47 "1uF" C0402 67.927,87.797 r270 top
C48 "12pF" C0402 67.98,81.555 r180 top
C49 "1uF" C0402 85.345,81.389 r180 top
C50 "100nF" C0402 85.361,82.406 r180 top
C51 "12pF" C0402 70.327,81.57 r180 top
C52 "4.7uF" C0402 80.786,85.627 r90 bottom
C53 "100nF" C0402 79.22,88.137 r180 bottom
C54 "100nF-0201" C0201 106.011,74.945 r45 bottom
C55 "1uF" C0402 60.725,104.703 r0 bottom
C56 "4.7uF" C0402 70.957,103.811 r270 bottom
C57 "10uF" C0603 76.574,103.762 r90 bottom
C58 "100nF" C0402 77.756,103.789 r90 bottom
C59 "10uF" C0603 73.464,105.648 r180 bottom
C60 "100nF" C0402 73.455,104.445 r180 bottom
C61 "12pF" C0402 100.164,69.364 r90 top
C62 "12pF" C0402 100.164,71.702 r270 top
C63 "100nF" C0402 70.716,71.605 r180 bottom
C64 "22pF" C0402 65.395,77.554 r270 bottom
C65 "22uF" C0603 68.08,73.056 r270 top
C66 "100nF" C0402 66.848,73.071 r270 top
C67 "10uF" C0603 66.11,68.908 r90 bottom
C68 "100nF" C0402 67.285,68.903 r90 bottom
C69 "100nF" C0402 68.86,64.895 r0 bottom
C70 "100nF" C0402 87.524,67.731 r0 bottom
C71 "1uF" C0402 87.656,65.662 r0 bottom
C72 "1uF" C0402 79.557,66.252 r90 top
C73 "1nF" C0402 89.344,63.293 r180 bottom
C74 "1uF" C0402 82.764,59.734 r180 top
C75 "1uF" C0402 87.63,64.36 r0 bottom
C76 "22uF" C0603 88.523,60.342 r270 bottom
C77 "10uF" C0603 89.936,60.309 r270 bottom
C78 "22uF" C0603 83.121,69.929 r180 bottom
C79 "10uF" C0603 83.176,68.478 r180 bottom
C80 "10uF" C0603 85.092,66.153 r270 bottom
C81 "1nF" C0402 83.148,71.374 r180 bottom
C82 "1uF" C0402 78.186,65.254 r270 top
C83 "1uF" C0402 82.764,61.346 r180 top
C84 "22uF" C0603 86.109,58.833 r180 bottom
C85 "10uF" C0603 80.786,66.18 r270 bottom
C86 "1uF" C0402 79.55,66.273 r90 bottom
C87 "22uF" C0603 88.519,57.466 r270 bottom
C88 "10uF" C0603 89.924,57.454 r270 bottom
C89 "1nF" C0402 89.279,54.565 r180 bottom
C90 "1uF" C0402 84.105,53.431 r270 bottom
C91 "100nF" C0402 76.613,65.254 r90 top
C92 "22uF" C0603 77.568,68.722 r180 bottom
C93 "10uF" C0603 77.555,70.066 r180 bottom
C94 "1uF" C0402 82.408,57.003 r90 top
C95 "1uF" C0402 73.379,60.685 r180 top
C96 "1uF" C0402 80.05,56.995 r90 top
C97 "1uF" C0402 83.155,53.42 r270 bottom
C98 "1uF" C0402 73.431,58.513 r0 bottom
C99 "1uF" C0402 73.426,57.375 r180 bottom
C100 "100nF" C0402 80.166,70.062 r0 bottom
C101 "10uF" C0603 81.658,52.938 r90 bottom
C102 "1uF" C0402 81.41,57.03 r90 top
C103 "1uF" C0402 73.405,56.225 r0 bottom
C104 "1uF" C0402 73.411,59.642 r0 bottom
C105 "22uF" C0603 80.399,49.61 r180 bottom
C106 "10uF" C0603 80.567,50.687 r180 bottom
C107 "1uF" C0402 78.719,57.021 r90 top
C108 "1uF" C0402 78.518,53.474 r270 top
C109 "4.7uF" C0402 75.471,57.229 r90 top
C110 "1uF" C0402 77.736,57.016 r90 top
C111 "1uF" C0402 76.515,57.204 r90 top
C112 "10uF" C0603 76.323,54.208 r90 top
C113 "100pF" C0402 71.124,59.064 r270 bottom
C114 "680pF" C0402 77.695,51.071 r180 bottom
C115 "680pF" C0402 75.372,51.451 r0 bottom
C116 "100nF" C0402 73.414,58.653 r180 top
C117 "27pF" C0402 73.414,59.654 r0 top
C118 "22uF" C0603 90.202,82.147 r270 top
C119 "22uF" C0603 91.599,82.147 r270 top
C120 "22uF" C0603 90.224,82.094 r270 bottom
C121 "22uF" C0603 86.497,76.794 r180 bottom
C122 "22uF" C0603 86.505,75.35 r180 bottom
C123 "1uF" C0402 91.638,79.578 r90 top
C124 "NC" C0402 90.127,79.267 r90 bottom
C125 "1uF" C0402 75.256,65.77 r0 bottom
C126 "100nF-0201" C0201 112.474,71.222 r225 bottom
C127 "22uF" C0603 100.903,76.752 r180 bottom
C128 "10uF" C0603 100.227,79.186 r270 bottom
C129 "22uF" C0603 111.41,72.477 r315 bottom
C130 "100nF-0201" C0201 115.776,70.277 r135 bottom
C131 "100nF-0201" C0201 116.329,70.816 r135 bottom
C132 "22uF" C0603 103.727,81.496 r270 top
C133 "22uF" C0603 101.645,81.506 r90 bottom
C134 "22uF" C0603 102.312,81.492 r270 top
C135 "4.7uF" C0402 114.101,72.309 r315 bottom
C136 "4.7uF" C0402 113.298,70.771 r45 bottom
C137 "100nF-0201" C0201 113.919,77.089 r225 bottom
C138 "4.7uF" C0402 111.347,78.648 r315 bottom
C139 "22uF" C0603 103.855,66.838 r90 top
C140 "10uF" C0603 112.57,75.405 r45 bottom
C141 "22uF" C0603 105.27,66.845 r90 top
C142 "100nF-0201" C0201 114.558,76.522 r225 bottom
C143 "4.7uF" C0402 115.053,73.579 r135 bottom
C144 "4.7uF" C0402 115.706,74.315 r135 bottom
C145 "4.7uF" C0402 115.423,76.11 r225 bottom
C146 "22uF" C0603 103.839,64.014 r270 top
C147 "10uF" C0603 112.947,73.869 r45 bottom
C148 "22uF" C0603 105.297,64.068 r270 top
C149 "NC" C0402 140.298,71.642 r180 bottom
C150 "10uF" C0603 140.187,69.121 r180 bottom
C151 "100nF" C0402 128.213,69.873 r180 bottom
C152 "100nF" C0402 130.242,77.246 r0 bottom
C153 "100nF" C0402 136.702,77.376 r180 bottom
C154 "10uF" C0603 140.17,76.779 r180 bottom
C155 "100nF" C0402 130.054,71.812 r0 bottom
C156 "100nF" C0402 136.395,71.948 r180 bottom
C157 "100nF" C0402 127.377,77.258 r90 bottom
C158 "2.2uF" C0402 113.488,57.845 r270 top
C159 "100nF" C0402 113.045,60.342 r0 top
C160 "100nF" C0402 116.737,58.4 r270 top
C161 "100nF" C0402 118.489,61.917 r180 top
C162 "100nF" C0402 120.938,59.876 r0 top
C163 "100nF" C0402 118.471,60.899 r180 top
C164 "4.7uF" C0402 123.155,61.88 r180 top
C165 "100nF" C0402 118.478,59.891 r0 top
C166 "100nF" C0402 115.86,58.392 r90 top
C167 "4.7uF" C0402 120.871,61.91 r180 top
C168 "10uF" C0603 65.351,59.1 r90 bottom
C169 "100nF" C0402 66.553,59.046 r90 bottom
C170 "1uF" C0402 126.213,44.653 r180 bottom
C171 "100nF" C0402 123.422,46.888 r90 bottom
C172 "10uF" C0603 122.132,46.862 r90 bottom
C173 "100nF" C0402 107.823,68.326 r180 bottom
C174 "4.7uF" C0402 123.137,60.875 r180 top
C179 "100nF" C0402 88.519,58.801 r270 top
C180 "100nF-0201" C0201 115.784,72.533 r45 bottom
C181 "100nF-0201" C0201 117.289,74.507 r315 bottom
C182 "100nF-0201" C0201 116.782,74.004 r315 bottom
C183 "4.7uF" C0402 117.495,76.08 r225 bottom
C184 "4.7uF" C0402 119.812,84.967 r225 bottom
C185 "100nF-0201" C0201 116.644,72.058 r135 bottom
C186 "100nF-0201" C0201 117.187,72.62 r135 bottom
C187 "100nF-0201" C0201 118.186,75.703 r225 bottom
C188 "4.7uF" C0402 118.836,74.611 r225 bottom
C189 "10uF" C0603 80.358,48.248 r180 bottom
C190 "10uF" C0603 71.487,97.527 r90 top
C191 "100nF" C0402 70.214,97.541 r90 top
C192 "100nF-0201" C0201 112.624,69.087 r45 bottom
C193 "100nF-0201" C0201 114.339,70.27 r45 bottom
C194 "100nF-0201" C0201 112.101,69.711 r225 bottom
C195 "100nF-0201" C0201 114.83,69.752 r45 bottom
C196 "100nF-0201" C0201 117.223,78.096 r135 bottom
C197 "100nF-0201" C0201 116.697,77.542 r135 bottom
C198 "100nF-0201" C0201 116.248,77.069 r135 bottom
C199 "100nF-0201" C0201 111.613,70.682 r315 bottom
C200 "100nF" C0402 119.812,81.245 r45 bottom
C201 "4.7uF" C0402 119.161,81.933 r45 bottom
C202 "100nF-0201" C0201 117.87,78.55 r135 bottom
C203 "100nF-0201" C0201 110.239,73.934 r135 bottom
C204 "100nF-0201" C0201 110.098,70.214 r315 bottom
C205 "100nF-0201" C0201 113.879,68.891 r135 bottom
C206 "1uF" C0402 106.32,79.005 r270 bottom
C207 "100nF-0201" C0201 111.197,69.795 r45 bottom
C208 "1uF-0201" C0201 110.243,76.54 r315 bottom
C209 "100nF-0201" C0201 110.575,76.866 r315 bottom
C210 "100nF-0201" C0201 110.711,75.788 r45 bottom
C211 "1uF-0201" C0201 111.617,75.771 r45 bottom
C212 "100nF-0201" C0201 109.838,76.156 r315 bottom
C213 "100nF-0201" C0201 111.745,76.671 r45 bottom
C214 "1uF-0201" C0201 111.281,77.244 r225 bottom
C215 "100nF-0201" C0201 109.768,74.81 r45 bottom
C216 "1uF-0201" C0201 110.517,77.83 r45 bottom
C217 "100nF-0201" C0201 110.661,74.349 r135 bottom
C218 "1uF" C0402 105.287,79.02 r270 bottom
C219 "1uF" C0402 107.874,76.25 r315 bottom
C220 "100nF-0201" C0201 108.914,72.967 r45 bottom
C221 "100nF-0201" C0201 109.832,73.436 r135 bottom
C222 "1uF" C0402 104.341,79.032 r270 bottom
C223 "100nF-0201" C0201 105.802,76.313 r45 bottom
C224 "1uF" C0402 82.759,58.826 r0 top
C225 "100nF-0201" C0201 107.902,72.022 r45 bottom
C226 "1uF-0201" C0201 109.797,72.271 r225 bottom
C227 "100nF-0201" C0201 110.723,71.59 r135 bottom
C228 "1uF" C0402 105.854,70.086 r180 bottom
C229 "100nF-0201" C0201 109.322,70.968 r45 bottom
C230 "100nF-0201" C0201 108.846,73.878 r225 bottom
C231 "100nF-0201" C0201 105.822,71.837 r180 bottom
C233 "100nF" C0402 151.316,71.24 r270 top
C234 "100nF-0201" C0201 117.59,77.083 r225 bottom
C235 "1nF" C0402 129.455,62.93 r0 bottom
C236 "1nF" C0402 129.421,61.48 r0 top
C237 "100nF-0201" C0201 112.964,77.16 r45 bottom
C238 "100nF-0201" C0201 115.293,78.037 r135 bottom
C239 "100nF-0201" C0201 113.945,78.485 r315 bottom
C240 "100nF" C0402 68.787,64.985 r180 top
C241 "22pF" C0402 71.632,70.779 r0 top
C242 "10uF" C0603 75.08,72.457 r270 top
C243 "100nF" C0402 73.821,72.462 r270 top
C244 "10uF" C0603 64.806,64.327 r0 top
C245 "100nF" C0402 64.928,63.122 r0 top
C246 "100nF" C0402 68.428,69.266 r180 top
C247 "2.2uF" C0402 63.201,69.035 r270 bottom
C248 "12pF" C0402 74.132,63.852 r90 bottom
C249 "12pF" C0402 74.149,61.557 r270 bottom
C250 "100nF" C0402 103.611,48.587 r180 bottom
C251 "10uF" C0603 58.372,61.93 r180 top
C252 "1uF" C0402 68.693,51.786 r180 top
C253 "220pF" C0402 71.223,50.798 r180 top
CN1 "KH-HDMI-19P-Cu" HDMI-SMD_KH-HDMI-19P-CU 106.929,47.588 r0 top
CN3 "HC-1.25-2PWT" CONN-SMD_2P-P1.25-HC-1.25-2PWT 78.444,45.817 r0 top
CN4 "HC-1.25-2PWT" CONN-SMD_2P-P1.25-HC-1.25-2PWT 68.825,45.741 r0 top
D1 "ESD5344D-10/TR" DFN2510-10_L2.5-W1.0-P0.50-BL 110.201,53.966 r0 top
D2 "ESD5344D-10/TR" DFN2510-10_L2.5-W1.0-P0.50-BL 107.378,53.974 r0 top
D3 "TPESD5341N" X1-DFN1006-2_L1.0-W0.6-RD 101.492,53.958 r90 top
D4 "TPESD5341N" X1-DFN1006-2_L1.0-W0.6-RD 102.801,53.957 r90 top
D5 "TPESD5341N" X1-DFN1006-2_L1.0-W0.6-RD 104.11,53.95 r90 top
D6 "TPESD5341N" X1-DFN1006-2_L1.0-W0.6-RD 105.419,53.95 r90 top
D7 "1N5819WS" SOD-323_L1.8-W1.3-LS2.5-RD 96.713,57.647 r0 bottom
D8 "DSK34_C727076" SOD-323_L1.8-W1.3-LS2.5-RD 64.9,101.428 r0 bottom
D9 "BAT54CT" SOT-523-3_L1.6-W0.8-P1.00-LS1.6-BR 94.803,92.385 r90 bottom
F1 "BSMD0805L-200" F0805 63.006,58.553 r90 bottom
F2 "BSMD0805L-200" F0805 65.017,67.465 r270 top
FPC1 "AFE03-S31FMA-1H" FPC-SMD_P0.30-31P_FGS-XJ-H1.0 68.454,109.945 r0 bottom
FPC2 "0.5K-DX-6PWBG" FPC-SMD_6P-P0.50_DEALON_0.5K-DX-6PWB 80.447,108.436 r0 bottom
H1 "4" HDR-TH_4P-P2.54-V-M 142.772,110.791 r180 top
JP1 "6GHz" RF-SMD_FRF05002-JSS103M 58.801,95.936 r0 top
L1 "4.7uH" L1008 78.7,85.068 r270 bottom value=1uH
L2 "3.3uH" IND-SMD_L4.4-W4.2 66.298,73.948 r0 bottom value=1uH
L3 "470nH" IND-SMD_L2.0-W1.6_MHCHL201610A-1R0M-Q8A 83.145,66.141 r90 bottom value=1uH
L4 "470nH" IND-SMD_L2.0-W1.6_MHCHL201610A-1R0M-Q8A 86.488,60.593 r180 bottom value=1uH
L5 "470nH" IND-SMD_L2.0-W1.6_MHCHL201610A-1R0M-Q8A 86.068,56.907 r180 bottom value=1uH
L6 "470nH" IND-SMD_L2.0-W1.6_MHCHL201610A-1R0M-Q8A 77.85,66.146 r90 bottom value=1uH
L7 "470nH" IND-SMD_L2.0-W1.6_MHCHL201610A-1R0M-Q8A 79.674,52.865 r90 bottom value=1uH
L8 "180Ω" L0603 77.248,53.341 r90 bottom value=4.7uH
L9 "180Ω" L0603 75.829,53.334 r90 bottom value=4.7uH
L10 "180Ω" L0603 74.926,54.208 r90 top value=4.7uH
L11 "6.8uH" IND-SMD_L4.4-W4.2 73.269,67.129 r270 top value=1uH
LED1 "KT-0603B" LED0603-BL 63.886,73.819 r0 top
LED2 "E6C0606RGBC3UDA" LED-ARRAY-SMD_4P-L1.6-W1.6_SY-PB2333RGBC-010F 142.781,58.278 r90 top
LED3 "KT-0603B" LED0603-BL 150.197,101.984 r0 top
Q1 "2SK3018_C194460" SOT-23-3_L2.9-W1.3-P1.90-LS2.3-BR 98.746,56.225 r180 top
Q2 "2SK3018_C194460" SOT-23-3_L2.9-W1.3-P1.90-LS2.3-BR 106.703,52.802 r0 bottom
Q3 "2SK3018_C194460" SOT-23-3_L2.9-W1.3-P1.90-LS2.3-BR 106.686,55.516 r0 bottom
Q4 "CJ2301 S1" SOT-23_L2.9-W1.3-P1.90-LS2.4-BR 59.108,54.317 r180 bottom
Q5 "MMBT5401(RANGE:200-300)" SOT-23_L2.9-W1.3-P1.90-LS2.4-BR 62.809,54.355 r180 bottom
Q6 "MMBT5401(RANGE:200-300)" SOT-23_L2.9-W1.3-P1.90-LS2.4-BR 67.074,54.355 r180 bottom
R1 "22Ω" R0402 83.673,97.588 r90 top
R2 "22Ω" R0402 86.056,97.588 r90 top
R3 "22Ω" R0402 73.759,97.588 r90 top
R4 "22Ω" R0402 76.154,97.588 r90 top
R5 "22Ω" R0402 79.398,97.588 r90 top
R6 "22Ω" R0402 88.315,97.588 r90 top
R7 "0Ω" R0402 126.561,63.929 r180 top
R8 "22Ω" R0402 110.815,63.698 r270 top
R9 "22Ω" R0402 126.564,64.93 r180 top
R10 "22Ω" R0402 108.437,65.789 r180 top
R11 "10kΩ" R0402 75.404,91.775 r270 bottom
R12 "0Ω" R0402 81.066,89.23 r180 bottom
R13 "NC-4.7kΩ" R0402 85.262,85.586 r0 top
R14 "100kΩ" R0402 102.551,64.403 r90 top
R15 "1kΩ" R0402 102.545,66.429 r90 top
R16 "NC" R0402 97.281,53.824 r0 top
R17 "27kΩ" R0402 99.184,53.821 r0 top
R18 "1.8kΩ" R0402 102.16,53.42 r0 bottom
R19 "10kΩ" R0402 109.487,52.294 r90 bottom
R20 "1.8kΩ" R0402 102.165,54.303 r0 bottom
R21 "10kΩ" R0402 109.374,55.011 r90 bottom
R22-R29 "2.2Ω-0201" R0201 101.724,74.918 r315 top (schematic designator R22)
R23 "2.2Ω-0201" R0201 102.292,75.474 r315 top
R24 "2.2Ω-0201" R0201 102.888,76.082 r315 top
R25 "2.2Ω-0201" R0201 103.44,76.632 r315 top
R26 "2.2Ω-0201" R0201 104.028,77.175 r315 top
R27 "2.2Ω-0201" R0201 104.603,77.72 r315 top
R28 "2.2Ω-0201" R0201 105.136,78.275 r315 top
R29 "2.2Ω-0201" R0201 105.709,78.882 r315 top
R30 "1.62kΩ" R0402 107.559,74.73 r135 bottom
R31 "3.6Ω" R0603 63.626,105.385 r0 bottom
R32 "3.6Ω" R0603 63.638,104.083 r0 bottom
R33 "100kΩ" R0402 70.948,105.985 r270 bottom
R34 "2.2kΩ" R0402 105.789,81.084 r180 bottom
R35 "2.2kΩ" R0402 105.789,82.102 r180 bottom
R36 "22Ω" R0402 101.613,71.12 r0 top
R37 "1MΩ" R0402 101.637,69.88 r0 top
R38 "0Ω" R0402 108.437,71.367 r45 bottom
R39 "232kΩ" R0402 64.389,77.343 r270 bottom
R40 "5.1kΩ" R0402 64.477,72.4 r0 top
R41 "47kΩ" R0402 68.849,66.92 r0 bottom
R42 "30kΩ" R0402 68.851,65.877 r0 bottom
R43 "51kΩ" R0402 66.427,77.351 r90 bottom
R44 "10kΩ" R0402 77.744,71.702 r0 top
R45 "0Ω" R0402 77.748,72.675 r180 top
R46 "10kΩ" R0402 87.538,68.727 r0 bottom
R47 "100Ω" R0402 89.316,62.295 r180 bottom
R48 "100Ω" R0402 83.148,72.381 r180 bottom
R49 "0Ω" R0402 74.521,63.186 r0 top
R50 "NC" R0402 74.52,62.165 r180 top
R51 "100Ω" R0402 89.322,55.588 r180 bottom
R52 "180kΩ" R0402 80.127,71.086 r180 bottom
R53 "56kΩ" R0402 80.143,69.035 r0 bottom
R54 "47kΩ" R0402 80.137,50.546 r180 top
R55 "120kΩ" R0402 80.123,49.676 r0 top
R56 "100Ω" R0402 92.679,79.592 r90 top
R57 "51kΩ" R0402 90.103,79.352 r270 top
R58 "22Ω" R0402 89.085,78.556 r270 top
R59 "0Ω" R0402 75.207,67.848 r0 bottom
R60 "NC" R0402 75.216,66.802 r0 bottom
R61 "240Ω" R0402 134.196,83.978 r90 bottom
R62 "240Ω" R0402 133.144,83.978 r90 bottom
R63 "0Ω" R0402 137.501,84.004 r90 bottom
R64 "10kΩ" R0402 118.478,58.881 r0 top
R65 "10kΩ" R0402 116.883,60.24 r270 top
R66 "NC" R0402 115.968,60.24 r270 top
R67 "100Ω" R0402 144.493,107.678 r180 top
R68 "100Ω" R0402 140.89,107.688 r0 top
R69 "5.1kΩ" R0402 62.695,57.375 r90 top
R70 "2.2Ω" R0402 64.615,55.251 r0 top
R71 "2.2Ω" R0402 64.628,54.228 r0 top
R72 "5.1kΩ" R0402 62.695,51.235 r90 top
R73 "10kΩ" R0402 62.065,51.999 r180 bottom
R74 "51kΩ" R0402 67.884,51.99 r0 bottom
R75 "10kΩ" R0402 56.563,55.36 r90 bottom
R76 "2.2Ω" R0402 125.333,54.811 r180 top
R77 "0Ω" R0402 125.325,53.801 r0 top
R78 "15kΩ" R0402 56.575,53.443 r90 bottom
R79 "2.2Ω" R0402 127.357,54.824 r0 top
R80 "0Ω" R0402 127.338,53.808 r180 top
R81 "NC" R0402 124.428,47.069 r90 bottom
R82 "10kΩ" R0402 128.986,46.098 r270 bottom
R83 "10kΩ" R0402 128.962,48.005 r90 bottom
R84 "5.1kΩ" R0402 137.974,50.857 r180 top
R85 "5.1kΩ" R0402 145.186,50.857 r180 top
R86 "0Ω" R0402 123.148,59.896 r180 top
R87 "10kΩ" R0402 102.118,79.037 r90 bottom
R88 "NC" R0402 120.872,60.912 r0 top
R89 "NC" R0402 103.136,79.033 r270 bottom
R94 "0Ω" R0402 89.967,58.807 r90 top
R95 "10kΩ" R0402 87.524,58.733 r90 top
R96 "1kΩ" R0402 86.564,58.724 r90 top
R97 "120Ω" R0402 121.119,83.873 r225 bottom
R98 "2.2kΩ" R0402 103.047,75.194 r0 bottom
R99 "2.2kΩ" R0402 103.033,74.194 r0 bottom
R100 "2.2kΩ" R0402 103.047,72.754 r0 bottom
R101 "2.2kΩ" R0402 103.04,71.775 r0 bottom
R102 "0Ω" R0402 105.868,70.95 r180 bottom
R103 "100Ω" R0402 149.737,83.101 r270 top
R104 "100Ω" R0402 149.246,71.235 r270 top
R105 "100Ω" R0402 150.334,95.216 r90 top
R106 "10kΩ" R0402 149.312,95.236 r270 top
R107 "0Ω" R0402 116.812,79.337 r225 bottom
R108 "0Ω" R0402 118.232,82.942 r225 bottom
R109 "232kΩ" R0402 71.612,71.856 r0 top
R110 "47kΩ" R0402 64.92,62.105 r180 top
R111 "2.2Ω" R0402 63.086,67.969 r270 top
R112 "15kΩ-NC" R0402 68.321,70.176 r180 top
R113 "30kΩ" R0402 71.612,72.849 r180 top
R114 "10kΩ" R0402 118.456,57.845 r180 top
R115 "10kΩ" R0402 129.413,63.881 r0 bottom
R116 "NC" R0402 129.421,63.94 r180 top
R117 "10kΩ" R0402 150.438,100.642 r0 top
R118 "24kΩ" R0402 58.282,71.971 r0 top
R119 "1kΩ" R0402 58.258,60.694 r0 top
R120 "10kΩ" R0402 60.147,71.965 r180 top
R121 "2.2Ω" R0402 141.231,51.302 r270 top
R122 "2.2Ω" R0402 142.185,51.312 r270 top
R123 "100Ω" R0402 68.714,52.815 r180 top
R124 "2.2kΩ" R0402 68.707,50.781 r180 top
SW1 "PTS815SJK250SMTRLFS" SW-SMD_4P-L4.2-W3.3-P2.15-LS5.1 150.334,78.47 r90 top
SW2 "PTS815SJK250SMTRLFS" SW-SMD_4P-L4.2-W3.3-P2.15-LS5.1 150.334,67.108 r90 top
SW3 "PTS815SJK250SMTRLFS" SW-SMD_4P-L4.2-W3.3-P2.15-LS5.1 150.334,89.832 r90 top
SW4 "PTS815SJK250SMTRLFS" SW-SMD_4P-L4.2-W3.3-P2.15-LS5.1 150.438,55.746 r90 top
U1 "LPDDR4" FBGA-200_L15.0-W10.0-BL_H9HCNNNBKUMLXR 133.424,74.512 r270 top
U2 "RK3566" BGA-565_L15.5-W14.4-P0.40_RK3566_1 113.236,74.131 r225 top
U3 "SDINBDG4-8G" FBGA-153_L13.0-W11.5-P0.50_KLMAG1JETD-B041 117.954,59.929 r0 bottom
U4 "ESD5451N" DFN1006-2L-BI 74.605,97.562 r270 top
U5 "ESD5451N" DFN1006-2L-BI 85.079,97.562 r270 top
U6 "ESD5451N" DFN1006-2L-BI 82.754,97.562 r270 top
U7 "TF-01A_C91145" TF-SMD_TF-01A 78.286,105.019 r180 top
U8 "ESD5451N" DFN1006-2L-BI 81.02,97.562 r90 top
U9 "ESD5451N" DFN1006-2L-BI 78.487,97.562 r90 top
U10 "ESD5451N" DFN1006-2L-BI 77.112,97.562 r90 top
U11 "ESD5451N" DFN1006-2L-BI 87.416,97.562 r90 top
U12 "2.4GHz" QFN-44_L12.0-W12.0-P0.90-TL_AP6212 77.23,88.294 r0 top
U13 "WPN252012H100MT" IND-SMD_L2.5-W2.0_WPN252012H 68.558,101.442 r180 bottom
U14 "SY7201ABC" SOT-23-6_L2.9-W1.6-P0.95-LS2.8-BR 67.853,104.445 r180 bottom
U15 "ESD5451N" DFN1006-2L-BI 79.145,103.395 r90 bottom
U16 "ESD5451N" DFN1006-2L-BI 80.017,103.408 r90 bottom
U17 "ESD5451N" DFN1006-2L-BI 81.013,103.403 r90 bottom
U18 "ESD5451N" DFN1006-2L-BI 82.011,103.397 r90 bottom
U19 "SY8113BADC" SOT-23-6_L2.9-W1.6-P0.95-LS2.8-BR 70.618,69.408 r0 bottom
U20 "RK809-5" QFN-68_L7.0-W7.0-P0.35-BL-EP5.5 79.952,59.734 r180 bottom
U21 "240nH" IND-SMD_L2.5-W2.0_WPN252012H 87.479,81.312 r0 bottom
U22 "CH224K" ESSOP-10_L4.9-W3.9-P1.0-LS6.0-TL-EP 59.712,66.95 r0 top
U23 "ESD5451N" DFN1006-2L-BI 77.716,51.42 r180 top
U24 "ESD5451N" DFN1006-2L-BI 75.413,51.451 r0 top
U25 "ESD5451N" DFN1006-2L-BI 71.253,51.703 r180 top
U26 "ESD5451N" DFN1006-2L-BI 69.02,49.222 r0 top
U27 "ZX-XH2.54-2PLT" CONN-SMD_2P-P2.50_HCTL_HC-XH-2ALT 96.359,98.907 r0 top
U29 "ESD5451N" DFN1006-2L-BI 63.191,53.954 r90 top
U30 "ESD5451N" DFN1006-2L-BI 63.201,55.52 r270 top
U31 "ESD5451N" DFN1006-2L-BI 125.792,54.246 r90 bottom
U32 "ESD5451N" DFN1006-2L-BI 126.9,54.231 r270 bottom
U33 "SY6280AAC" SOT-23-5_L3.0-W1.7-P0.95-LS2.8-BL 126.621,47.215 r0 bottom
U35 "ESD5451N" DFN1006-2L-BI 150.858,83.06 r270 top
U36 "ESD5451N" DFN1006-2L-BI 150.315,71.228 r270 top
U37 "ESD5451N" DFN1006-2L-BI 151.324,95.217 r270 top
U38 "HX PZ2.54-1x6P ZZ" HDR-TH_6P-P2.54-V-M 114.768,110.761 r0 top
U39 "HX PZ2.54-1x6P ZZ" HDR-TH_6P-P2.54-V-M 130.074,110.761 r180 top
U40 "HX PZ2.54-1x6P ZZ" HDR-TH_6P-P2.54-V-M 99.552,110.761 r180 top
U41 "SY8113BADC" SOT-23-6_L2.9-W1.6-P0.95-LS2.8-BR 68.707,67.056 r0 top
U42 "ESD5451N" DFN1006-2L-BI 144.474,108.62 r180 top
U43 "ESD5451N" DFN1006-2L-BI 140.892,108.645 r0 top
U44 "HX PZ2.54-1x6P ZZ" HDR-TH_6P-P2.54-V-M 99.552,107.573 r180 top
USB1 "TYPE-C 16PIN 2MD(073)" USB-C-SMD_TYPE-C-6PIN-2MD-073 57.609,54.355 r270 top
USB2 "AF 10.0 HC6.3" USB-A-TH_AF-10.0-HC6.3 126.434,50.598 r0 top
USB3 "TYPE-C 16PIN 2MD(073)" USB-C-SMD_TYPE-C-6PIN-2MD-073 141.231,45.058 r0 top
USB4 "TYPE-C 16PIN 2MD(073)" USB-C-SMD_TYPE-C-6PIN-2MD-073 57.609,79.506 r270 top
X1 "26MHz" CRYSTAL-SMD_4P-L2.0-W1.6-BL 69.057,79.411 r180 top
X2 "24MHz" CRYSTAL-SMD_4P-L3.2-W2.5-BL 97.664,70.405 r270 top
X3 "XKXGI-SUA-32.768K" CRYSTAL-SMD_L3.2-W1.5-1 72.267,62.767 r90 bottom

## Footprints (in the part's own frame and the unit in brackets; to place one, negate y for a bottom-side part, rotate by r counter-clockwise, add the part's x,y. Pads: shape width x height; smd on the part's side, far side on the other; paste and mask are expansions set on the pad)
AUDIO-SMD_PJ-393 [mm]
  rect 2.5x1.4 smd paste+0.051: 1(3.45,-4) 2(3.45,-1.1) 3(3.45,1.8) 4(-3.45,2.1) 6(-3.45,-3) 7(-3.45,-0.1) 8(3.45,4)
  Keep-Out Layer circle w0.003: c0,-4.5 r0.6
  Keep-Out Layer circle w0.003: c0,2.5 r0.6
  Keep-Out Layer region: 0.6,-4.5 0.6,-4.619 0.509,-4.84 0.34,-5.009 0.119,-5.1 -0.119,-5.1 -0.34,-5.009 -0.509,-4.84 -0.6,-4.619 -0.6,-4.5 -0.6,-4.381 -0.509,-4.16 -0.34,-3.991 -0.119,-3.9 0.119,-3.9 0.34,-3.991 0.509,-4.16 0.6,-4.381 0.6,-4.5 0.6,-4.5
  Keep-Out Layer region: 0.6,-4.5 0.6,-4.619 0.509,-4.84 0.34,-5.009 0.119,-5.1 -0.119,-5.1 -0.34,-5.009 -0.509,-4.84 -0.6,-4.619 -0.6,-4.5 -0.6,-4.381 -0.509,-4.16 -0.34,-3.991 -0.119,-3.9 0.119,-3.9 0.34,-3.991 0.509,-4.16 0.6,-4.381 0.6,-4.5 0.6,-4.5
  Keep-Out Layer region: 0.6,2.5 0.6,2.38 0.509,2.16 0.34,1.991 0.119,1.9 -0.119,1.9 -0.34,1.991 -0.509,2.16 -0.6,2.38 -0.6,2.5 -0.6,2.619 -0.509,2.84 -0.34,3.008 -0.119,3.1 0.119,3.1 0.34,3.008 0.509,2.84 0.6,2.619 0.6,2.5 0.6,2.5
  Keep-Out Layer region: 0.6,2.5 0.6,2.38 0.509,2.16 0.34,1.991 0.119,1.9 -0.119,1.9 -0.34,1.991 -0.509,2.16 -0.6,2.38 -0.6,2.5 -0.6,2.619 -0.509,2.84 -0.34,3.008 -0.119,3.1 0.119,3.1 0.34,3.008 0.509,2.84 0.6,2.619 0.6,2.5 0.6,2.5
  silkscreen extent -3,-8 3.9,6.5, body extent -4.24,-7.86 4.26,6.44, height 4.83
BAT-SMD_CR1220-2ZX [mm]
  rect 4.5x2.3 smd paste+0.051: 1(-8.6,0) 2(8.6,0)
  Keep-Out Layer circle w0.003: c3.75,0 r0.5
  Keep-Out Layer circle w0.003: c-3.75,0 r0.6
  Keep-Out Layer region: 4.25,0 4.25,-0.099 4.174,-0.283 4.033,-0.424 3.85,-0.5 3.651,-0.5 3.467,-0.424 3.326,-0.283 3.25,-0.099 3.25,0 3.25,0.099 3.326,0.283 3.467,0.424 3.651,0.5 3.85,0.5 4.033,0.424 4.174,0.283 4.25,0.099 4.25,0 4.25,0
  Keep-Out Layer region: 4.25,0 4.25,-0.099 4.174,-0.283 4.033,-0.424 3.85,-0.5 3.651,-0.5 3.467,-0.424 3.326,-0.283 3.25,-0.099 3.25,0 3.25,0.099 3.326,0.283 3.467,0.424 3.651,0.5 3.85,0.5 4.033,0.424 4.174,0.283 4.25,0.099 4.25,0 4.25,0
  Keep-Out Layer region: -3.15,0 -3.15,-0.119 -3.241,-0.34 -3.41,-0.509 -3.631,-0.6 -3.869,-0.6 -4.09,-0.509 -4.259,-0.34 -4.35,-0.119 -4.35,0 -4.35,0.119 -4.259,0.34 -4.09,0.509 -3.869,0.6 -3.631,0.6 -3.41,0.509 -3.241,0.34 -3.15,0.119 -3.15,0 -3.15,0
  Keep-Out Layer region: -3.15,0 -3.15,-0.119 -3.241,-0.34 -3.41,-0.509 -3.631,-0.6 -3.869,-0.6 -4.09,-0.509 -4.259,-0.34 -4.35,-0.119 -4.35,0 -4.35,0.119 -4.259,0.34 -4.09,0.509 -3.869,0.6 -3.631,0.6 -3.41,0.509 -3.241,0.34 -3.15,0.119 -3.15,0 -3.15,0
  silkscreen extent -8.24,-7.19 7.11,7.24, body extent -11.55,-9.79 11.45,9.21, height 4.6
BGA-565_L15.5-W14.4-P0.40_RK3566_1 [mm]
  round 0.22 smd paste+0.051: 1A1(-6.175,5.525) 1A2(-5.525,5.525) 1A3(-4.875,5.525) 1A4(-4.225,5.525) 1A5(-3.575,5.525) 1A6(-2.925,5.525) 1A7(-2.275,5.525) 1A8(-1.625,5.525) 1A9(-0.975,5.525) 1A10(-0.325,5.525) 1A11(0.325,5.525) 1A13(1.625,5.525) 1A14(2.275,5.525) 1A15(2.925,5.525) 1A16(3.575,5.525) 1A17(4.225,5.525) 1A18(4.875,5.525) 1A19(5.525,5.525) 1A20(6.175,5.525) 1B1(-6.175,4.875) 1B3(-4.875,4.875) 1B5(-3.575,4.875) 1B6(-2.925,4.875) 1B7(-2.275,4.875) 1B8(-1.625,4.875) 1B9(-0.975,4.875) 1B10(-0.325,4.875) 1B11(0.325,4.875) 1B13(1.625,4.875) 1B14(2.275,4.875) 1B15(2.925,4.875) 1B16(3.575,4.875) 1B17(4.225,4.875) 1B18(4.875,4.875) 1B19(5.525,4.875) 1B20(6.175,4.875) 1C1(-6.175,4.225) 1C2(-5.525,4.225) 1C3(-4.875,4.225) 1C4(-4.225,4.225) 1C5(-3.575,4.225) 1C6(-2.925,4.225) 1C7(-2.275,4.225) 1C8(-1.625,4.225) 1C9(-0.975,4.225) 1C10(-0.325,4.225) 1C12(0.975,4.225) 1C13(1.625,4.225) 1C14(2.275,4.225) 1C15(2.925,4.225) 1C16(3.575,4.225) 1C17(4.225,4.225) 1C18(4.875,4.225) 1C19(5.525,4.225) 1C20(6.175,4.225) 1D1(-6.175,3.575) 1D2(-5.525,3.575) 1D3(-4.875,3.575) 1D4(-4.225,3.575) 1D5(-3.575,3.575) 1D6(-2.925,3.575) 1D7(-2.275,3.575) 1D8(-1.625,3.575) 1D9(-0.975,3.575) 1D10(-0.325,3.575) 1D11(0.325,3.575) 1D12(0.975,3.575) 1D13(1.625,3.575) 1D14(2.275,3.575) 1D15(2.925,3.575) 1D16(3.575,3.575) 1D17(4.225,3.575) 1D18(4.875,3.575) 1D19(5.525,3.575) 1D20(6.175,3.575) 1E1(-6.175,2.925) 1E2(-5.525,2.925) 1E3(-4.875,2.925) 1E4(-4.225,2.925) 1E6(-2.925,2.925) 1E7(-2.275,2.925) 1E8(-1.625,2.925) 1E9(-0.975,2.925) 1E10(-0.325,2.925) 1E11(0.325,2.925) 1E12(0.975,2.925) 1E13(1.625,2.925) 1E14(2.275,2.925) 1E15(2.925,2.925) 1E16(3.575,2.925) 1E17(4.225,2.925) 1E18(4.875,2.925) 1E19(5.525,2.925) 1E20(6.175,2.925) 1F1(-6.175,2.275) 1F2(-5.525,2.275) 1F3(-4.875,2.275) 1F4(-4.225,2.275) 1F5(-3.575,2.275) 1F6(-2.925,2.275) 1F7(-2.275,2.275) 1F8(-1.625,2.275) 1F9(-0.975,2.275) 1F10(-0.325,2.275) 1F11(0.325,2.275) 1F12(0.975,2.275) 1F13(1.625,2.275) 1F14(2.275,2.275) 1F15(2.925,2.275) 1F16(3.575,2.275) 1F17(4.225,2.275) 1F18(4.875,2.275) 1F19(5.525,2.275) 1F20(6.175,2.275) 1G1(-6.175,1.625) 1G2(-5.525,1.625) 1G3(-4.875,1.625) 1G4(-4.225,1.625) 1G5(-3.575,1.625) 1G6(-2.925,1.625) 1G7(-2.275,1.625) 1G8(-1.625,1.625) 1G9(-0.975,1.625) 1G10(-0.325,1.625) 1G11(0.325,1.625) 1G12(0.975,1.625) 1G13(1.625,1.625) 1G14(2.275,1.625) 1G15(2.925,1.625) 1G16(3.575,1.625) 1G17(4.225,1.625) 1G18(4.875,1.625) 1G19(5.525,1.625) 1G20(6.175,1.625) 1H1(-6.175,0.975) 1H2(-5.525,0.975) 1H3(-4.875,0.975) 1H4(-4.225,0.975) 1H5(-3.575,0.975) 1H6(-2.925,0.975) 1H7(-2.275,0.975) 1H8(-1.625,0.975) 1H9(-0.975,0.975) 1H10(-0.325,0.975) 1H11(0.325,0.975) 1H12(0.975,0.975) 1H13(1.625,0.975) 1H14(2.275,0.975) 1H15(2.925,0.975) 1H16(3.575,0.975) 1H17(4.225,0.975) 1H18(4.875,0.975) 1H19(5.525,0.975) 1H20(6.175,0.975) 1J1(-6.175,0.325) 1J2(-5.525,0.325) 1J3(-4.875,0.325) 1J4(-4.225,0.325) 1J5(-3.575,0.325) 1J6(-2.925,0.325) 1J7(-2.275,0.325) 1J8(-1.625,0.325) 1J9(-0.975,0.325) 1J10(-0.325,0.325) 1J11(0.325,0.325) 1J12(0.975,0.325) 1J13(1.625,0.325) 1J14(2.275,0.325) 1J15(2.925,0.325) 1J16(3.575,0.325) 1J17(4.225,0.325) 1J18(4.875,0.325) 1J19(5.525,0.325) 1J20(6.175,0.325) 1K2(-5.525,-0.325) 1K3(-4.875,-0.325) 1K4(-4.225,-0.325) 1K5(-3.575,-0.325) 1K6(-2.925,-0.325) 1K7(-2.275,-0.325) 1K8(-1.625,-0.325) 1K9(-0.975,-0.325) 1K10(-0.325,-0.325) 1K11(0.325,-0.325) 1K12(0.975,-0.325) 1K13(1.625,-0.325) 1K14(2.275,-0.325) 1K15(2.925,-0.325) 1K16(3.575,-0.325) 1K17(4.225,-0.325) 1K18(4.875,-0.325) 1K19(5.525,-0.325) 1K20(6.175,-0.325) 1L1(-6.175,-0.975) 1L2(-5.525,-0.975) 1L3(-4.875,-0.975) 1L4(-4.225,-0.975) 1L5(-3.575,-0.975) 1L6(-2.925,-0.975) 1L7(-2.275,-0.975) 1L8(-1.625,-0.975) 1L9(-0.975,-0.975) 1L10(-0.325,-0.975) 1L11(0.325,-0.975) 1L12(0.975,-0.975) 1L13(1.625,-0.975) 1L14(2.275,-0.975) 1L15(2.925,-0.975) 1L19(5.525,-0.975) 1M3(-4.875,-1.625) 1M4(-4.225,-1.625) 1M5(-3.575,-1.625) 1M6(-2.925,-1.625) 1M7(-2.275,-1.625) 1M8(-1.625,-1.625) 1M9(-0.975,-1.625) 1M10(-0.325,-1.625) 1M11(0.325,-1.625) 1M12(0.975,-1.625) 1M13(1.625,-1.625) 1M14(2.275,-1.625) 1M15(2.925,-1.625) 1M16(3.575,-1.625) 1M17(4.225,-1.625) 1M18(4.875,-1.625) 1M19(5.525,-1.625) 1M20(6.175,-1.625) 1N1(-6.175,-2.275) 1N2(-5.525,-2.275) 1N3(-4.875,-2.275) 1N4(-4.225,-2.275) 1N5(-3.575,-2.275) 1N6(-2.925,-2.275) 1N7(-2.275,-2.275) 1N8(-1.625,-2.275) 1N9(-0.975,-2.275) 1N10(-0.325,-2.275) 1N11(0.325,-2.275) 1N12(0.975,-2.275) 1N13(1.625,-2.275) 1N14(2.275,-2.275) 1N15(2.925,-2.275) 1N16(3.575,-2.275) 1N17(4.225,-2.275) 1N18(4.875,-2.275) 1N19(5.525,-2.275) 1N20(6.175,-2.275) 1P1(-6.175,-2.925) 1P2(-5.525,-2.925) 1P3(-4.875,-2.925) 1P4(-4.225,-2.925) 1P5(-3.575,-2.925) 1P6(-2.925,-2.925) 1P7(-2.275,-2.925) 1P8(-1.625,-2.925) 1P9(-0.975,-2.925) 1P10(-0.325,-2.925) 1P11(0.325,-2.925) 1P12(0.975,-2.925) 1P13(1.625,-2.925) 1P14(2.275,-2.925) 1P15(2.925,-2.925) 1P16(3.575,-2.925) 1P17(4.225,-2.925) 1P18(4.875,-2.925) 1P19(5.525,-2.925) 1P20(6.175,-2.925) 1R1(-6.175,-3.575) 1R2(-5.525,-3.575) 1R3(-4.875,-3.575) 1R4(-4.225,-3.575) 1R5(-3.575,-3.575) 1R6(-2.925,-3.575) 1R7(-2.275,-3.575) 1R8(-1.625,-3.575) 1R9(-0.975,-3.575) 1R10(-0.325,-3.575) 1R11(0.325,-3.575) 1R12(0.975,-3.575) 1R13(1.625,-3.575) 1R14(2.275,-3.575) 1R15(2.925,-3.575) 1R16(3.575,-3.575) 1R17(4.225,-3.575) 1R18(4.875,-3.575) 1R19(5.525,-3.575) 1R20(6.175,-3.575) 1T1(-6.175,-4.225) 1T2(-5.525,-4.225) 1T3(-4.875,-4.225) 1T4(-4.225,-4.225) 1T5(-3.575,-4.225) 1T6(-2.925,-4.225) 1T7(-2.275,-4.225) 1T8(-1.625,-4.225) 1T9(-0.975,-4.225) 1T10(-0.325,-4.225) 1T11(0.325,-4.225) 1T12(0.975,-4.225) 1T13(1.625,-4.225) 1T14(2.275,-4.225) 1T15(2.925,-4.225) 1T16(3.575,-4.225) 1T17(4.225,-4.225) 1T18(4.875,-4.225) 1T19(5.525,-4.225) 1T20(6.175,-4.225) 1U1(-6.175,-4.875) 1U2(-5.525,-4.875) 1U3(-4.875,-4.875) 1U4(-4.225,-4.875) 1U5(-3.575,-4.875) 1U6(-2.925,-4.875) 1U7(-2.275,-4.875) 1U8(-1.625,-4.875) 1U9(-0.975,-4.875) 1U11(0.325,-4.875) 1U12(0.975,-4.875) 1U13(1.625,-4.875) 1U15(2.925,-4.875) 1U16(3.575,-4.875) 1U17(4.225,-4.875) 1U18(4.875,-4.875) 1U19(5.525,-4.875) 1U20(6.175,-4.875) 1V1(-6.175,-5.525) 1V2(-5.525,-5.525) 1V3(-4.875,-5.525) 1V4(-4.225,-5.525) 1V5(-3.575,-5.525) 1V6(-2.925,-5.525) 1V7(-2.275,-5.525) 1V8(-1.625,-5.525) 1V9(-0.975,-5.525) 1V11(0.325,-5.525) 1V12(0.975,-5.525) 1V13(1.625,-5.525) 1V15(2.925,-5.525) 1V16(3.575,-5.525) 1V17(4.225,-5.525) 1V18(4.875,-5.525) 1V19(5.525,-5.525) 1V20(6.175,-5.525)
  round 0.22 smd paste+0 mask+0.038: A1(-7.4,6.8) A2(-7,6.8) A3(-6.6,6.8) A5(-5.8,6.8) A7(-5,6.8) A9(-4.2,6.8) A10(-3.8,6.8) A12(-3,6.8) A13(-2.6,6.8) A15(-1.8,6.8) A17(-1,6.8) A19(-0.2,6.8) A20(0.2,6.8) A22(1,6.8) A23(1.4,6.8) A26(2.6,6.8) A27(3,6.8) A29(3.8,6.8) A30(4.2,6.8) A32(5,6.8) A33(5.4,6.8) A35(6.2,6.8) A37(7,6.8) A38(7.4,6.8) AA2(-7,-1.2) AA37(7,-1.2) AA38(7.4,-1.2) AB1(-7.4,-1.6) AB2(-7,-1.6) AB37(7,-1.6) AB38(7.4,-1.6) AC2(-7,-2) AC37(7,-2) AD1(-7.4,-2.4) AD2(-7,-2.4) AD37(7,-2.4) AD38(7.4,-2.4) AE2(-7,-2.8) AE37(7,-2.8) AF1(-7.4,-3.2) AF2(-7,-3.2) AF37(7,-3.2) AF38(7.4,-3.2) AG2(-7,-3.6) AG37(7,-3.6) AG38(7.4,-3.6) AH2(-7,-4) AH37(7,-4) AJ1(-7.4,-4.4) AJ2(-7,-4.4) AJ37(7,-4.4) AJ38(7.4,-4.4) AK2(-7,-4.8) AK37(7,-4.8) AK38(7.4,-4.8) AL1(-7.4,-5.2) AL2(-7,-5.2) AL37(7,-5.2) AM1(-7.4,-5.6) AM2(-7,-5.6) AM37(7,-5.6) AM38(7.4,-5.6) AN2(-7,-6) AN37(7,-6) AN38(7.4,-6) AP1(-7.4,-6.4) AP2(-7,-6.4) AP3(-6.6,-6.4) AP4(-6.2,-6.4) AP5(-5.8,-6.4) AP6(-5.4,-6.4) AP7(-5,-6.4) AP8(-4.6,-6.4) AP9(-4.2,-6.4) AP10(-3.8,-6.4) AP11(-3.4,-6.4) AP12(-3,-6.4) AP13(-2.6,-6.4) AP14(-2.2,-6.4) AP15(-1.8,-6.4) AP16(-1.4,-6.4) AP17(-1,-6.4) AP18(-0.6,-6.4) AP19(-0.2,-6.4) AP20(0.2,-6.4) AP21(0.6,-6.4) AP22(1,-6.4) AP23(1.4,-6.4) AP24(1.8,-6.4) AP25(2.2,-6.4) AP26(2.6,-6.4) AP27(3,-6.4) AP28(3.4,-6.4) AP29(3.8,-6.4) AP30(4.2,-6.4) AP31(4.6,-6.4) AP32(5,-6.4) AP33(5.4,-6.4) AP34(5.8,-6.4) AP35(6.2,-6.4) AP36(6.6,-6.4) AP37(7,-6.4) AR1(-7.4,-6.8) AR2(-7,-6.8) AR4(-6.2,-6.8) AR6(-5.4,-6.8) AR7(-5,-6.8) AR9(-4.2,-6.8) AR10(-3.8,-6.8) AR12(-3,-6.8) AR14(-2.2,-6.8) AR15(-1.8,-6.8) AR17(-1,-6.8) AR18(-0.6,-6.8) AR20(0.2,-6.8) AR21(0.6,-6.8) AR23(1.4,-6.8) AR24(1.8,-6.8) AR26(2.6,-6.8) AR27(3,-6.8) AR29(3.8,-6.8) AR30(4.2,-6.8) AR32(5,-6.8) AR33(5.4,-6.8) AR35(6.2,-6.8) AR36(6.6,-6.8) AR38(7.4,-6.8) B1(-7.4,6.4) B2(-7,6.4) B3(-6.6,6.4) B4(-6.2,6.4) B5(-5.8,6.4) B6(-5.4,6.4) B7(-5,6.4) B8(-4.6,6.4) B9(-4.2,6.4) B10(-3.8,6.4) B11(-3.4,6.4) B12(-3,6.4) B13(-2.6,6.4) B14(-2.2,6.4) B15(-1.8,6.4) B16(-1.4,6.4) B17(-1,6.4) B18(-0.6,6.4) B19(-0.2,6.4) B20(0.2,6.4) B21(0.6,6.4) B22(1,6.4) B23(1.4,6.4) B24(1.8,6.4) B25(2.2,6.4) B26(2.6,6.4) B27(3,6.4) B28(3.4,6.4) B29(3.8,6.4) B30(4.2,6.4) B31(4.6,6.4) B32(5,6.4) B33(5.4,6.4) B34(5.8,6.4) B35(6.2,6.4) B36(6.6,6.4) B37(7,6.4) B38(7.4,6.4) C1(-7.4,6) C2(-7,6) C37(7,6) D2(-7,5.6) D37(7,5.6) D38(7.4,5.6) E1(-7.4,5.2) E2(-7,5.2) E37(7,5.2) F1(-7.4,4.8) F2(-7,4.8) F37(7,4.8) F38(7.4,4.8) G2(-7,4.4) G37(7,4.4) G38(7.4,4.4) H1(-7.4,4) H2(-7,4) H37(7,4) J2(-7,3.6) J37(7,3.6) J38(7.4,3.6) K1(-7.4,3.2) K2(-7,3.2) K37(7,3.2) K38(7.4,3.2) L2(-7,2.8) L37(7,2.8) M1(-7.4,2.4) M2(-7,2.4) M37(7,2.4) M38(7.4,2.4) N1(-7.4,2) N2(-7,2) N37(7,2) N38(7.4,2) P2(-7,1.6) P37(7,1.6) R1(-7.4,1.2) R2(-7,1.2) R37(7,1.2) R38(7.4,1.2) T2(-7,0.8) T37(7,0.8) T38(7.4,0.8) U2(-7,0.4) U37(7,0.4) V1(-7.4,0) V2(-7,0) V37(7,0) V38(7.4,0) W2(-7,-0.4) W37(7,-0.4) W38(7.4,-0.4) Y1(-7.4,-0.8) Y2(-7,-0.8) Y37(7,-0.8)
  silkscreen extent -8.53,-7.24 7.77,7.21, body extent -7.79,-7.24 7.75,7.11, height 0.25
C0201 [mm]
  rect 0.368x0.324 smd paste-100 mask+0.051: 1(-0.274,0) 2(0.274,0)
  silkscreen extent -0.69,-0.39 0.69,0.39, body extent -0.33,-0.15 0.33,0.16, height 0.3
C0402 [mm]
  rect 0.79x0.54 smd paste-100 mask+0.051: 1(-0.545,0) 2(0.545,0)
  silkscreen extent -1.17,-0.5 1.17,0.5, body extent -0.5,-0.25 0.5,0.25, height 0.5
C0603 [mm]
  rect 0.8x0.9 smd: 1(-0.7,0) 2(0.7,0)
  silkscreen extent -1.39,-0.71 1.39,0.71, body extent -0.8,-0.4 0.8,0.4, height 0.5
CONN-SMD_2P-P1.25-HC-1.25-2PWT [mm]
  rect 0.8x2.2 smd paste+0 mask+0.05: 1(-0.625,1.285) 2(0.625,1.285)
  rect 2.35x2.5 smd paste+0 mask+0.05: 3(-3.005,-1.285) 4(3.005,-1.285)
  silkscreen extent -3.75,-3.73 3.75,1.48, body extent -3.83,-3.31 3.82,1.89, height 3.4
CONN-SMD_2P-P2.50_HCTL_HC-XH-2ALT [mm]
  rect 1.2x4.5 smd paste+0 mask+0.05: 1(-1.25,2.425) 2(1.25,2.425)
  rect 1.6x3 smd paste+0 mask+0.05: 3(4.35,-2.425) 4(-4.35,-2.425)
  silkscreen extent -5,-4.57 5,2.72, body extent -4.99,-4.63 5.01,3.77, height 7.7
CRYSTAL-SMD_4P-L2.0-W1.6-BL [mm]
  rect 0.9x0.8 smd paste+0.051: 1(-0.7,-0.55) 2(0.7,-0.55) 3(0.7,0.55) 4(-0.7,0.55)
  silkscreen extent -1.65,-1.45 1.35,1.15, body extent -0.99,-0.84 1.01,0.76, height 0.81
CRYSTAL-SMD_4P-L3.2-W2.5-BL [mm]
  rect 1.4x1.2 smd: 1(-1.1,-0.85) 2(1.1,-0.85) 3(1.1,0.85) 4(-1.1,0.85)
  silkscreen extent -2.26,-1.91 2.03,1.68, body extent -1.6,-1.38 1.6,1.12, height 1.2
CRYSTAL-SMD_L3.2-W1.5-1 [mm]
  rect 1.05x1.7 smd paste+0.051: 1(-1.275,0) 2(1.275,0)
  silkscreen extent -2.03,-1.08 2.03,1.08, body extent -1.6,-0.75 1.6,0.75, height 0.8
DFN1006-2L-BI [mm]
  rect 0.45x0.55 smd: 1(-0.425,0) 2(0.425,0)
  silkscreen extent -0.8,-0.4 0.8,0.4, body extent -0.5,-0.29 0.5,0.31, height 0.32
DFN2510-10_L2.5-W1.0-P0.50-BL [mm]
  rect 0.2x0.665 smd paste-100 mask+0.051: 1(-1,-0.433) 2(-0.5,-0.433) 4(0.5,-0.433) 5(1,-0.433) 6(1,0.433) 7(0.5,0.433) 9(-0.5,0.433) 10(-1,0.433)
  rect 0.4x0.665 smd paste-100 mask+0.051: 3(0,-0.433) 8(0,0.433)
  silkscreen extent -1.33,-1.11 1.33,0.58, body extent -1.26,-0.51 1.24,0.49, height 0.51